# Allegro board CutiePi_V1_2.brd
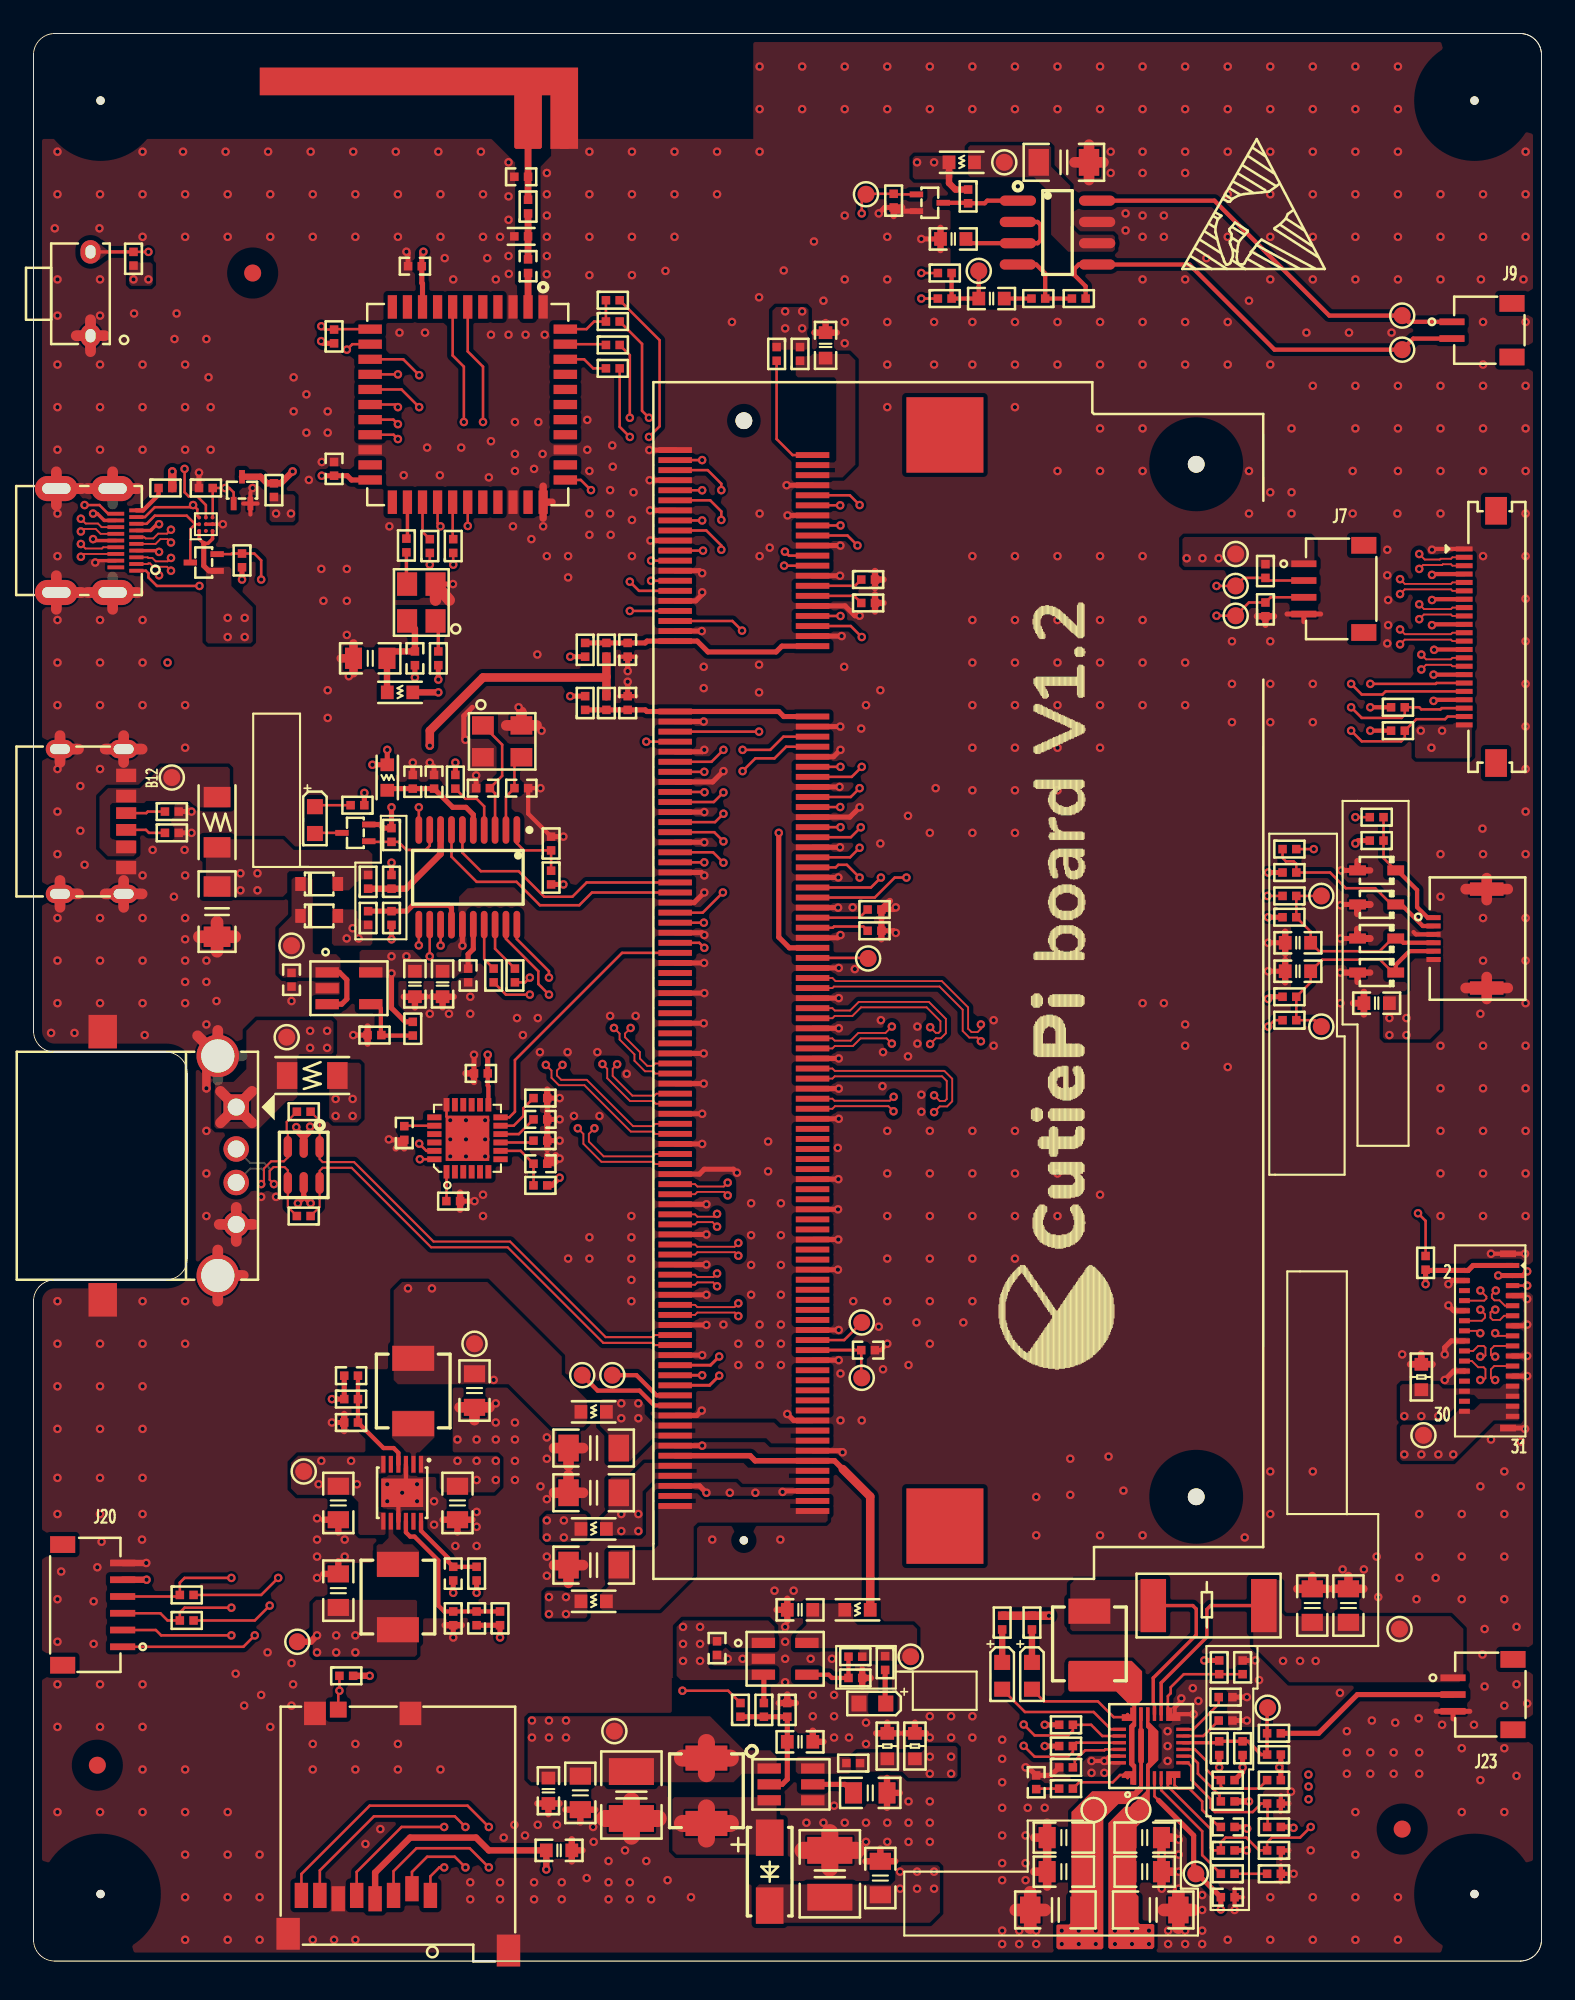
[diagram p0: board, top side]
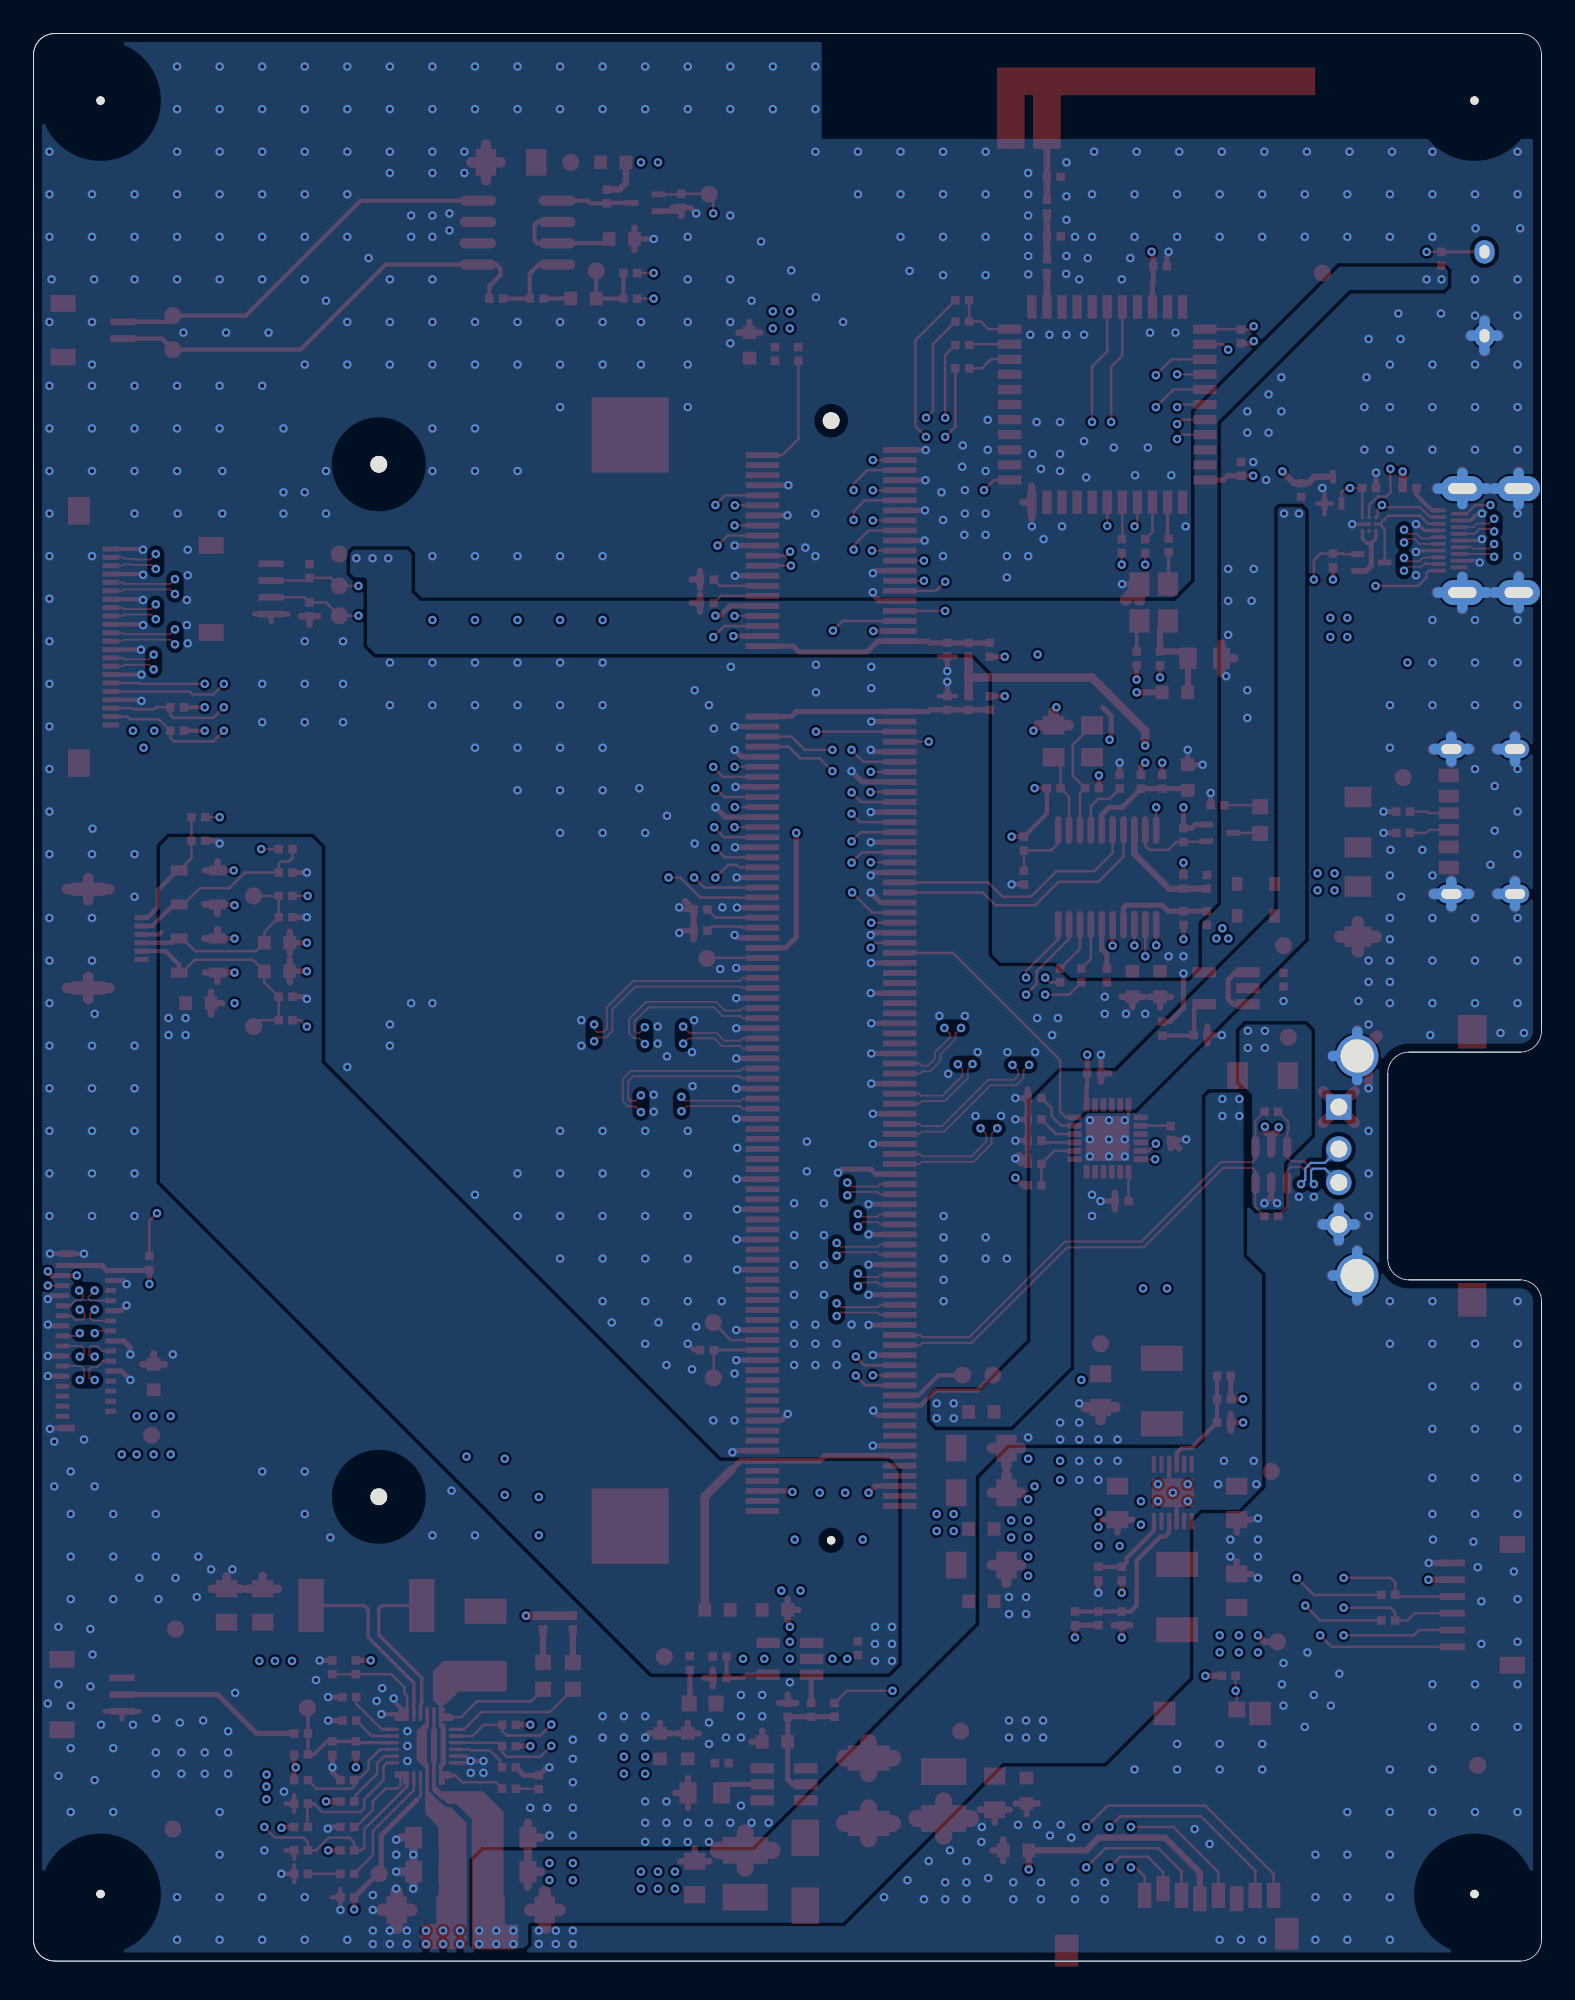
[diagram p1: board, bottom side, seen from below]

Outline 90.01 x 115 mm; copper layers: TOP, GND02, L03, L04, VCC05, BOTTOM. Coordinates in mm from the lower left corner of the outline.
Outline path: 0,113.73 0,55.5 ; 0,113.73 arc(0.37,114.63) 1.27,115 ; 0,113.73 0,55.5 ; 0,55.5 arc(0.37,54.6) 1.27,54.23 ; 1.27,115 88.74,115 ; 1.27,115 88.74,115 ; 0,39.37 0,1.27 ; 0,39.37 arc(0.37,40.27) 1.27,40.64 ; 0,39.37 0,1.27 ; 0,1.27 arc(0.37,0.37) 1.27,0 ; 1.27,40.64 7.91,40.64 ; 1.27,40.64 7.91,40.64 ; 88.74,115 arc(89.64,114.63) 90.01,113.73 ; 88.74,115 arc(89.64,114.63) 90.01,113.73 ; 1.27,54.23 7.91,54.23 ; 1.27,54.23 7.91,54.23 ; 7.91,54.23 arc(8.81,53.86) 9.18,52.96 ; 7.91,40.64 arc(8.81,41.01) 9.18,41.91 ; 1.27,0 88.74,0 ; 1.27,0 88.74,0 ; 88.74,0 arc(89.64,0.37) 90.01,1.27 ; 88.74,0 arc(89.64,0.37) 90.01,1.27 ; 9.18,52.96 9.18,41.91 ; 9.18,52.96 9.18,41.91 ; 90.01,113.73 90.01,1.27 ; 90.01,113.73 90.01,1.27

## Design rules (mm)
constraint set DEFAULT: min track width 0.152
net group N12785811: nets N12785811 N12785823
net group PCM_DIN: nets N12785967 PCM_DIN
net group PCM_DOUT: nets N12786047 PCM_DOUT
net group RXD1: nets N12785567 RXD1
net group TXD1: nets N12785535 TXD1
net group USB_D: nets USB_DM USB_DP
net group USB_PRE: nets N12666038 N12666138
net group BOOST_EN: nets BOOST_EN CHARGE_EN N12757066
net group CAM: nets CAM1_CN CAM1_CP CAM1_DN0 CAM1_DN1 CAM1_DN2 CAM1_DN3 CAM1_DP0 CAM1_DP1 CAM1_DP2 CAM1_DP3
net group CTS1: nets CTS1 N12785599 RTS1
net group DSI: nets DSI1_CN DSI1_CP DSI1_DN0 DSI1_DN1 DSI1_DN2 DSI1_DN3 DSI1_DP0 DSI1_DP1 DSI1_DP2 DSI1_DP3
net group GPIO9: nets GPIO9 N12403491 TXD0
net group GPIO10: nets GPIO10 N12403489 RXD0
net group HDMI: nets HDMI_CK_N HDMI_CK_P HDMI_D0_N HDMI_D0_P HDMI_D1_N HDMI_D1_P HDMI_D2_N HDMI_D2_P
net group VBUSA: nets N12836963

## Placement (name value [footprint] x y rotation side)
C1  47u/6.3V  [C1206]  33.43 23.62 180 top
C2  47u/6.3V  [C1206]  10.96 62.61 270 top
C3  47u/6.3V  [C1206]  33.43 27.94 180 top
C4  1u/10V  [C0402]  40.8 18.67 270 top
C5  4.7u/16V  [C0603]  45.75 20.95 180 top
C6  100n  [C0402]  25.05 23.11 270 top
C7  10u/16V  [C0805]  18.19 27.33 270 top
C8  10u/16V  [C0805]  25.31 27.33 270 top
C10  47u/6.3V  [C1206]  33.43 30.61 180 top
C11  10u/16V  [C0805]  18.19 22.1 90 top
C12  10u/16V  [C0805]  26.32 34.04 270 top
C13  1u/10V  [C0402]  35.47 78.23 270 top
C14  1u/10V  [C0402]  35.47 75.06 90 top
C20  47u/6.3V  [C1206]  61.5 107.31 0 top
C21  NC  [C0402]  18.96 34.92 0 top
C22  NC  [C0402]  26.45 20.45 90 top
C23  4.7u/16V  [C0603]  47.28 96.39 90 top
C24  4.7u/16V  [C0603]  31.37 6.6 0 top
C68  0.1uF/50V  [C0603]  30.73 10.16 270 top
C69  1.0uF/25V  [C0805]  32.64 10.03 270 top
C73  0.1uF/50V  [C0603]  45.75 13.08 0 top
C74  0.22uF/50V  [C0805]  49.94 10.03 0 top
C76  4.7uF/50V  [C1210]  47.53 5.21 90 top
C78  0.22uF/50V  [C0805]  50.55 4.95 90 top
C80  0.1uF/50V  [C0603]  80.17 57.15 180 top
C81  0.1uF/50V  [C0603]  75.47 60.75 180 top
C82  1000pF/50V  [C0603]  75.47 59.05 180 top
C85  4.7uF/50V  [C1210]  35.69 9.91 90 top
C86  4.7u/16V  [C0603]  54.9 102.74 180 top
C87  0.39u/16V  [C0603]  57.18 99.19 0 top
C383  100n  [C0402]  30.25 47.57 0 top
C384  100n  [C0402]  30.25 50.22 0 top
C385  100n  [C0402]  26.7 52.96 180 top
C386  2.2n  [C0402]  22.13 49.4 90 top
C2474  1u/10V  [C0402]  23.91 70.36 90 top
C2475  12pF/50V  [C0402]  29.12 69.98 0 top
C2476  12pF/50V  [C0402]  26.83 69.98 180 top
C2477  100n  [C0402]  25.94 58.8 270 top
C2478  4.7u/16V  [C0603]  24.42 58.29 270 top
C2479  10n  [C0402]  22.64 70.36 90 top
C2480  1u/10V  [C0402]  15.4 58.55 270 top
C2481  4.7u/16V  [C0603]  22.77 58.29 270 top
C2483  2.2u  [C0402]  59.85 10.67 270 top
C2484  47u/6.3V  [C1206]  60.99 3.05 180 top
C2485  10u/16V  [C0805]  61.5 5.33 180 top
C2486  10u/16V  [C0805]  61.5 7.37 180 top
C2487  47u/6.3V  [C1206]  66.84 3.05 0 top
C2488  10u/16V  [C0805]  66.33 5.33 0 top
C2489  10u/16V  [C0805]  66.33 7.37 0 top
C2490  10u/16V  [C0805]  76.33 21.21 90 top
C2491  10u/16V  [C0805]  78.49 21.21 90 top
C2492  100n  [C0402]  71.28 3.81 0 top
C2493  100n  [C0402]  71.28 8 0 top
C2498  270pF  [C0402]  29.52 101.12 270 top
C2499  1.5pF  [C0402]  29.11 106.45 180 top
C2500  100n  [C0402]  22.77 101.12 180 top
C2501  100n  [C0402]  17.94 89.03 90 top
C2502  0.1uF  [C0402]  22.77 77.72 270 top
C2503  10u/16V  [C0805]  20.1 77.72 0 top
D1  RED  [LED0603]  50.07 15.37 0 top
D10  SS14-M3/61T  [DO-214AC]  43.94 5.33 90 top
D11  ESDLIN1524BJ  [SOD323]  80.17 63.04 0 top
D12  ESDLIN1524BJ  [SOD323]  80.17 65.07 0 top
D13  ESDLIN1524BJ  [SOD323]  80.17 58.97 0 top
D14  ESDLIN1524BJ  [SOD323]  80.17 61.01 0 top
D17  BAT54HT1  [DIO-SOD323]  17.05 64.26 0 top
D18  BAT54HT1  [DIO-SOD323]  17.05 62.36 0 top
D19  GREEN  [LED0603]  16.8 68.07 90 top
D20  GREEN  [LED0603]  57.82 17.02 90 top
D21  GREEN  [LED0603]  59.6 17.02 90 top
F1  6V/2A  [1206]  10.96 67.94 270 top
F2  6V/0.5A  [1206]  16.64 52.83 180 top
FB2  BLM18PG121SH1  [SL0603]  55.41 107.31 0 top
FB3  BLM18PG121SH1  [SL0603]  33.43 21.46 0 top
FB4  BLM18PG121SH1  [SL0603]  33.43 25.78 0 top
FB5  BLM18PG121SH1  [SL0603]  33.43 32.77 0 top
FB6  BLM18PG121SH1  [SL0603]  49.18 20.95 0 top
FB7  BLM18PG121SH1  [SL0603]  21.12 70.61 270 top
FB9  BLM18PG121SH1  [SL0603]  21.88 75.69 0 top
J1  DDR2 SODIMM  [FCI_10033853_CM]  42.4 58.5 90 top
J2  Type C  [TYPE_C_P]  3.56 67.99 270 top
J7  SH1.0-4  [SH1_0_4]  75.82 81.87 90 top
J9  SH1.0-2  [SH1_0_2]  84.67 97.3 90 top
J11  54548-2271  [MOLEX_54548-2271]  85.4 79 90 top
J13  467651001  [MICRO_HDMI]  5.53 84.75 270 top
J14  USB-A  [USB_AM]  12.1 47.45 0 top
J16  473521001_sd  [MOLEX_473521001]  21.78 7.81 0 top
J17  FH52-6S-0.5SH  [CONFPC6_05MM_FH52]  85.15 61 90 top
J20  SH1.0-6  [SH1_0_6]  5.32 21.25 270 top
J21  FH26W-31S-0.3SHW  [CONFPC31_03MM_FH26W]  86.85 37 90 top
J23  SH1.0-3  [SH1_0_3]  84.73 15.9 90 top
L1  4.7u/16V  [SHC0402]  21.75 21.72 270 top
L2  4.7u/16V  [SHC0402]  22.66 34.01 90 top
L5  10uH/20%  [SHC0402]  40.17 10.16 270 top
L634  1.5u  [SHC0402]  63.03 18.92 90 top
L635  2.7nH/0.3nH  [L0402]  29.11 102.9 180 top
NOREF  -  []  1.36 81.65 90 top
NOREF#2  -  []  3.4 96.97 90 top
NOREF#3  -  [unnamed#2]  86.01 111 0 top
NOREF#4  -  []  5.53 67.49 90 top
NOREF#5  -  []  4.13 39.45 0 top
NOREF#6  -  []  5.38 63.67 90 top
NOREF#7  -  [unnamed#3]  81.69 7.87 0 top
NOREF#8  -  []  4 4 0 top
NOREF#9  -  [unnamed#2]  4 4 0 top
NOREF#10  -  []  -1.02 72.46 0 top
NOREF#11  -  []  86.01 4 90 top
NOREF#12  -  [unnamed#2]  86.01 4 0 top
NOREF#13  -  []  -1.02 63.52 90 top
NOREF#14  -  []  1.58 63.67 0 top
NOREF#15  -  []  -1 67.65 0 top
NOREF#16  -  []  -1.03 81.5 90 top
NOREF#17  -  []  6.14 86.55 90 top
NOREF#18  -  []  4.91 83.15 90 top
NOREF#19  -  []  11 40.9 0 top
NOREF#20  -  []  3.18 83.23 90 top
NOREF#21  -  []  4.55 96.47 90 top
NOREF#22  -  []  -1.03 81.5 90 top
NOREF#23  -  []  12.1 43.95 90 top
NOREF#24  -  []  3.17 78.87 0 top
NOREF#25  -  [unnamed#2]  4 111 0 top
NOREF#26  -  []  -1 54.25 90 top
NOREF#27  -  []  -1.02 63.52 90 top
NOREF#28  -  []  1.74 17.65 90 top
NOREF#29  -  []  -1.03 81.5 90 top
NOREF#30  -  []  15.94 62.36 0 top
NOREF#31  -  []  1.36 81.65 0 top
NOREF#32  -  []  11 40.9 90 top
NOREF#33  -  []  5.38 63.67 0 top
NOREF#34  -  []  4.13 39.45 90 top
NOREF#35  -  []  5.53 65.24 90 top
NOREF#36  -  []  12.1 46.45 90 top
NOREF#37  -  [unnamed#3]  13.08 100.71 0 top
NOREF#38  -  []  6.14 82.95 90 top
NOREF#39  -  []  5.32 18.75 90 top
NOREF#40  -  []  4.91 86.35 90 top
NOREF#41  -  []  4.55 96.47 90 top
NOREF#42  -  []  15.94 64.26 0 top
NOREF#43  -  []  5.53 66.47 90 top
NOREF#44  -  [unnamed#3]  3.81 11.68 0 top
NOREF#45  -  []  6.14 84.55 90 top
NOREF#46  -  []  1.58 63.67 90 top
NOREF#47  -  []  68.36 100.83 0 top
NOREF#48  -  []  3.4 96.97 90 top
PCB1  F_PCB  [ANT_F]  29.52 108.37 0 top
Q3  DMG1012T  [SOT50P160X90-3N]  10.16 83.44 180 top
Q4  DMG1012T  [SOT50P160X90-3N]  12.45 87.76 90 top
Q5  DMG1012T  [SOT50P160X90-3N]  19.21 67.31 180 top
Q6  DMG1012T  [SOT50P160X90-3N]  53.5 104.9 0 top
R2  100K  [R0402]  26.45 23.11 90 top
R3  2.49K  [R0402]  50.83 17.78 270 top
R7  0  [R0402]  32.93 78.23 270 top
R8  0  [R0402]  32.93 75.06 90 top
R12  4.7K  [C0402]  49.82 36.45 180 top
R15  NC  [R0402]  12.45 83.57 270 top
R16  4.7K  [R0402]  81.44 74.8 0 top
R17  4.7K  [R0402]  81.44 73.41 0 top
R18  10K  [R0402]  14.35 87.76 270 top
R22  0  [R0402]  18.96 33.53 0 top
R23  0  [R0402]  27.85 20.45 90 top
R24  NC  [R0402]  25.05 20.45 270 top
R25  NC  [R0402]  18.96 32.13 180 top
R26  100K  [R0402]  49.82 81.03 0 top
R27  100K  [R0402]  49.82 82.42 0 top
R28  100K  [R0402]  50.2 61.47 0 top
R29  100K  [R0402]  50.2 62.74 0 top
R30  10K  [R0402]  44.36 95.89 270 top
R31  0  [R0402]  45.75 95.89 90 top
R32  NC_0  [R0402]  34.2 78.23 270 top
R33  NC_0  [R0402]  34.2 75.06 90 top
R42  0  [R0402]  74.96 66.34 0 top
R43  0  [R0402]  80.17 68.25 180 top
R87  NC_10K  [R0402]  44.99 14.99 270 top
R88  0  [R0402]  42.2 14.99 90 top
R89  0  [R0402]  48.93 11.81 180 top
R90  3.3/1%  [R0603]  52.61 12.83 90 top
R91  3.3/1%  [R0603]  50.96 12.83 90 top
R110  39.2K  [R0402]  49.06 18.16 180 top
R112  36.5K  [R0402]  49.06 16.89 180 top
R114  4.7K  [R0402]  74.96 64.94 180 top
R115  4.7K  [R0402]  80.17 66.85 180 top
R117  10K  [R0402]  74.96 62.28 0 top
R118  NC_10K  [R0402]  74.96 57.53 0 top
R120  0  [R0402]  74.96 56.13 180 top
R121  0  [R0402]  74.96 63.55 180 top
R122  NC_0  [R0402]  16.13 44.45 180 top
R123  NC_0  [R0402]  16.13 50.67 180 top
R124  4.7K  [R0402]  55.79 105.28 270 top
R125  20K  [R0402]  62.39 99.19 180 top
R126  20K  [R0402]  59.98 99.19 180 top
R127  0  [R0402]  54.39 100.71 0 top
R128  NC_0  [R0402]  54.39 99.19 0 top
R272  10K  [R0402]  25.18 70.36 90 top
R368  10K  [R0402]  25.05 45.34 180 top
R370  0  [R0402]  30.25 46.28 180 top
R371  10K  [R0402]  30.25 51.49 180 top
R373  0  [R0402]  30.25 48.95 180 top
R3039  10K  [R0402]  30.89 66.67 90 top
R3040  NC_10K  [R0402]  30.89 64.64 270 top
R3041  0  [R0402]  27.47 58.8 90 top
R3042  0  [R0402]  28.74 58.8 90 top
R3043  10K  [R0402]  73.53 82.93 270 top
R3044  10K  [R0402]  73.53 80.64 270 top
R3049  30.1K  [R0402]  22.64 55.63 270 top
R3051  52.3K  [R0402]  20.35 55.24 0 top
R3052  15K  [R0402]  19.97 62.23 270 top
R3053  52.3K  [R0402]  21.37 62.23 270 top
R3054  10K  [R0402]  5.97 101.56 270 top
R3057  10K  [R0402]  83.09 41.66 90 top
R3058  0  [R0402]  7.87 87.88 0 top
R3059  10K  [R0402]  21.37 67.18 270 top
R3060  2.49K  [R0402]  19.34 68.96 180 top
R3061  10K  [R0402]  51.34 105.03 90 top
R3062  10K  [R0402]  10.29 87.88 0 top
R3063  NC_3.3/1%  [R0603]  82.84 34.84 90 top
R3064  15K  [R0402]  19.97 64.39 90 top
R3065  52.3K  [R0402]  21.37 64.39 90 top
R3066  10K  [R0402]  43.59 14.99 270 top
R3086  31.6K  [R0402]  74.04 10.79 180 top
R3087  2.49K  [R0402]  61.63 10.29 0 top
R3088  10K  [R0402]  71.28 10.79 180 top
R3089  20m/1W  [R2512]  70.14 21.21 0 top
R3090  5.1K  [R0402]  74.04 9.4 180 top
R3091  15K  [R0402]  74.04 8 0 top
R3092  5.1K  [R0402]  74.04 6.6 180 top
R3093  15K  [R0402]  71.28 6.6 0 top
R3094  10K  [R0402]  61.63 14.1 180 top
R3095  2.49K  [R0402]  57.82 20.19 90 top
R3096  10K  [R0402]  61.63 12.83 180 top
R3097  2.49K  [R0402]  71.28 9.53 0 top
R3098  0  [R0402]  74.04 13.59 180 top
R3099  10K  [R0402]  61.63 11.56 0 top
R3100  2.49K  [R0402]  59.6 20.19 90 top
R3101  10K  [R0402]  70.77 12.7 90 top
R3102  10K  [R0402]  70.77 17.53 270 top
R3103  30.1K  [R0402]  72.17 12.7 90 top
R3104  10K  [R0402]  72.17 17.53 270 top
R3105  10K  [R0402]  71.28 5.21 180 top
R3106  82.5K  [R0402]  71.15 14.35 180 top
R3107  39.2K  [R0402]  71.15 15.75 180 top
R3108  10K  [R0402]  74.04 5.21 0 top
R3122  0  [R0402]  34.58 95.02 0 top
R3123  0  [R0402]  34.58 96.42 0 top
R3124  0  [R0402]  34.58 99.09 0 top
R3125  NC_0  [R0402]  34.58 97.82 0 top
R3126  0  [R0402]  29.52 104.67 90 top
R3127  0  [R0402]  25.05 84.42 90 top
R3128  0  [R0402]  23.66 84.42 90 top
R3129  10K  [R0402]  17.94 96.93 90 top
R3130  10K  [R0402]  24.16 77.72 270 top
R3131  0  [R0402]  22.26 84.45 270 top
R3132  10K  [R0402]  18.67 17.02 0 top
R3133  5.1K  [R0402]  8.26 68.58 0 top
R3134  5.1K  [R0402]  8.26 67.31 0 top
R3135  0  [R0402]  9.14 21.84 0 top
R3136  0  [R0402]  9.14 20.32 0 top
R3137  36.5K  [R0402]  74.04 12.32 180 top
SW2  TC-0143  [BUTTON]  3.4 99.47 270 top
TP28  TEST POINT  [TESTPOINT_39MIL]  76.87 63.55 90 top
TP29  TEST POINT  [TESTPOINT_39MIL]  76.87 55.75 90 top
TP30  TEST POINT  [TESTPOINT_39MIL]  34.67 13.72 270 top
TP33  TEST POINT  [TESTPOINT_39MIL]  82.96 31.37 0 top
TP41  TEST POINT  [TESTPOINT_39MIL]  8.26 70.61 0 top
TP43  TEST POINT  [TESTPOINT_39MIL]  63.28 9.02 0 top
TP44  TEST POINT  [TESTPOINT_39MIL]  81.53 19.81 0 top
TP45  TEST POINT  [TESTPOINT_39MIL]  69.38 5.21 0 top
TP46  TEST POINT  [TESTPOINT_39MIL]  65.95 9.02 0 top
TP47  TEST POINT  [TESTPOINT_39MIL]  73.66 15.11 0 top
TP48  TEST POINT  [TESTPOINT_39MIL]  15.75 19.05 270 top
TP49  TEST POINT  [TESTPOINT_39MIL]  26.32 36.83 270 top
TP50  TEST POINT  [TESTPOINT_39MIL]  52.36 18.16 0 top
TP51  TEST POINT  [TESTPOINT_39MIL]  49.82 59.82 0 top
TP52  TEST POINT  [TESTPOINT_39MIL]  15.11 55.12 0 top
TP53  TEST POINT  [TESTPOINT_39MIL]  49.44 34.8 0 top
TP54  TEST POINT  [TESTPOINT_39MIL]  49.44 38.1 0 top
TP55  TEST POINT  [TESTPOINT_39MIL]  32.75 34.95 0 top
TP56  TEST POINT  [TESTPOINT_39MIL]  34.55 34.95 0 top
TP57  TEST POINT  [TESTPOINT_39MIL]  57.95 107.31 90 top
TP58  TEST POINT  [TESTPOINT_39MIL]  56.42 100.84 90 top
TP59  TEST POINT  [TESTPOINT_39MIL]  49.69 105.41 90 top
TP60  TEST POINT  [TESTPOINT_39MIL]  81.69 96.14 0 top
TP61  TEST POINT  [TESTPOINT_39MIL]  81.69 98.17 0 top
TP62  TEST POINT  [TESTPOINT_39MIL]  71.75 82.04 270 top
TP63  TEST POINT  [TESTPOINT_39MIL]  71.75 80.26 270 top
TP64  TEST POINT  [TESTPOINT_39MIL]  15.4 60.58 180 top
TP65  TEST POINT  [TESTPOINT_39MIL]  71.75 83.95 270 top
TP66  TEST POINT  [TESTPOINT_39MIL]  16.13 29.21 0 top
U1  PAM2306AYPKE  [DIODES_PAM2306]  22 27.94 270 top
U2  TPS73633DBVR  [SOT23_5]  44.86 18.03 270 top
U4  ESD5384_NC  [ONSEMI_ESD5384]  10.29 85.72 90 top
U5  IP4234CZ6  [TSOP6]  16.13 47.5 180 top
U6  TPS61165DBV  [SOT23_6B]  45.21 10.54 270 top
U12  LM4871MX  [SOIC8_1D27MM]  61.12 103.12 270 top
U18  stm32f030f4p6  [TSSOP20_0D65MM]  25.92 64.66 180 top
U57  MPU6050  [QFN24_05MM_0404MML]  25.9 49.09 90 top
U60  TPS73633DBVR  [SOT23_5]  18.83 58.04 270 top
U597  MP2636GR  [QFN-30]  66.71 12.83 90 top
U598  RTL8723BS  [MOD44_RTL8723BS]  25.92 92.86 270 top
Y2  25M  [XTAL-3225_25M]  27.97 72.77 180 top
Y10  32.768KHz  [XTAL-3225_32K]  23.15 81.05 90 top

## Library data of the parts
C1-C3 C10 C20 C2484 C2487 = CAP_3216_6.3V_47u: Tolerance: tol*
C4 C13 C14 C2480 = CAP_1005_6.3V_1u
C5 C23 C24 C86 C87 C2478 C2481 = CAP_1608_6.3V_4.7u: Tolerance: tol*
C6 C383-C386 C2474 C2477 C2479 C2483 C2492 C2493 C2500 C2501 = CAP_1005_6.3V_100n
C7 C8 C11 C12 C2485 C2486 C2488-C2491 = CAP_2012_6.3V_10u: Tolerance: tol*
C21 C22 = CAP_1005_NF
C68 C69 C73 C74 C76 C78 C82 C85 = CAP: Tolerance: tol*
C80 C81 = CAP_0: Tolerance: tol*
C2475 C2476 = C_0603_22P/50V/5%
C2498 C2499 C2502 = C_0
C2503 = C_0: Tolerance: tol*
D1 = LED_1608_RED_0
D10 = S100: User Part Number: pn
D11-D14 = SMAJ30CA: User Part Number: PN
D17 D18 = DIODE_0: User Part Number: PN
D19-D21 = LED_1608_GREEN_0
F1 F2 = FUSE_POLY_2.0A_6V: Tolerance: tol*
FB2-FB7 = INDUCTOR_0: Tolerance: tol*; room: USB+5V
FB9 = BEAD_0: Tolerance: tol*
J1 = CON_200W_DDR2SODIMM_CM
J2 = CON_uUSB_B_3: User Part Number: PN
J7 = A2002WV-6P_7
J9 = A2002WV-6P_8
J11 = CON_22W_FFC_54548-2271
J13 = CON_HDMI_RA: User Part Number: PN
J14 = CON_USBA_RA_PTH_0
J16 = CON_uSD_2: User Part Number: PN
J17 = A2002WV-6P_3: User Part Number: PN
J20 = A2002WV-6P_2
J21 = CON32_1: User Part Number: PN
J23 = A2002WV-6P_4
L1 L2 L634 = IND_4u7_SRN4018-4R7M: User Part Number: pn
L5 = IND: User Part Number: pn
L635 = INDUCTOR
PCB1 = RF_1: User Part Number: PN
Q3-Q6 = MOSFET_N_DMG1012T
R2 R18 R26-R29 R3059 R3061 R3062 R3133 R3134 = RES_1005_100K
R3 R3060 = RES_1005_470R
R7 R8 R31-R33 = RES_2012_0R
R12 = RES_1005_1K
R15 = RES_1005_27K
R16 R17 = RES_1005_1.8K
R22 R23 = RES_1005_0R
R24 R25 = RES_1005_NF
R30 R3132 = RES_1005_47K
R42 R43 R87-R89 R120-R123 R127 R128 R368 R370 R371 R373 R3052 R3057 R3064 R3066 R3086-R3088 R3090-R3093 R3095 R3097-R3108 R3129 R3137 = RES
R90 R91 R3063 R3089 = RES: Tolerance: tol*
R110 R112 R114 R115 R117 R118 R124-R126 R3049 R3051 R3053 R3065 = RES_0
R272 R3054 = R_0603_10K/5%
R3039 R3040 R3130 R3131 = R_0402_22R/5%
R3041 R3042 R3058 R3094 R3096 R3122-R3128 R3135 R3136 = R_1: signal model: DEFAULT_RESISTOR_0.001OHM_1_2
R3043 R3044 = R_0603/4.7K/5%
SW2 = SKEG_DIP2_2: User Part Number: PN
TP28-TP30 TP33 TP41 TP43-TP66 = Test pad: Tolerance: *; User Part Number: *; room: P10-PMIC
U1 = IC_SMPS_DUAL_1A_3V3_2
U2 U60 = LP3470/SOT23_1
U4 = IC_ESD5384_1
U5 = TMP100-Q1_0: User Part Number: pn
U6 = TPS61165TDB
U12 = SMD_EEPROM_SO8_0: User Part Number: pn
U18 = XF6000SYE_1: User Part Number: pn
U57 = TUSB1210BRHBT_2: User Part Number: PN
U597 = STM8AF6226TA_5: User Part Number: PN
U598 = STM8AF6226TA_9: User Part Number: PN
Y2 = X_0
Y10 = XTAL-3225-4P-TXC_0

## Footprints (pads in the part's own frame, mm; a bottom-side part is the same pattern mirrored in y, then rotated)
1206
  rect 1.219x1.6 smd: 1(-1.5,0) 2(1.5,0)
ANT_F
  rect 0.5x0.5 smd: 1(0,0) 2(2.159,0)
BUTTON
  oval 1.4x1.2 hole 0.8x0.6: 1(2.5,0) 2(-2.5,0)
C0402
  rect 0.508x0.508 smd: 1(-0.41,0) 2(0.41,0)
C0603
  rect 0.762x0.813 smd: 1(-0.76,0) 2(0.76,0)
C0805
  rect 1.016x1.27 smd: 1(-1,0) 2(1,0)
C1206
  rect 1.219x1.6 smd: 1(-1.5,0) 2(1.5,0)
C1210
  rect 1.6x2.692 smd: 1(-1.4,0) 2(1.4,0)
CONFPC6_05MM_FH52
  rect 0.3x0.85 smd: 1(1.25,1.587) 2(0.75,1.587) 3(0.25,1.587) 4(-0.25,1.587) 5(-0.75,1.587) 6(-1.25,1.587)
  rect 0.8x2 smd: 7(-2.95,-1.587) 8(2.95,-1.587)
CONFPC31_03MM_FH26W
  rect 0.3x0.8 smd: 1(4.5,-1.437) 3(3.9,-1.437) 5(3.3,-1.437) 7(2.7,-1.437) 9(2.1,-1.437) 11(1.5,-1.437) 13(0.9,-1.437) 15(0.3,-1.437) 17(-0.3,-1.437) 19(-0.9,-1.437) 21(-1.5,-1.437) 23(-2.1,-1.437) 25(-2.7,-1.437) 27(-3.3,-1.437) 29(-3.9,-1.437) 31(-4.5,-1.437)
  rect 0.3x0.65 smd: 2(4.2,1.437) 4(3.6,1.437) 6(3,1.437) 8(2.4,1.437) 10(1.8,1.437) 12(1.2,1.437) 14(0.6,1.437) 16(0,1.437) 18(-0.6,1.437) 20(-1.2,1.437) 22(-1.8,1.437) 24(-2.4,1.437) 26(-3,1.437) 28(-3.6,1.437) 30(-4.2,1.437)
  rect 0.4x0.95 smd: G1(-5.2,-1.165) G2(5.2,-1.165)
DIO-SOD323
  rect 0.63x0.83 smd: 1(-1.115,0) 2(1.115,0)
DIODES_PAM2306
  rect 1x0.25 smd: 1(-1.7,1.125) 2(-1.7,0.675) 3(-1.7,0.225) 4(-1.7,-0.225) 5(-1.7,-0.675) 6(-1.7,-1.125) 7(1.7,-1.125) 8(1.7,-0.675) 9(1.7,-0.225) 10(1.7,0.225) 11(1.7,0.675) 12(1.7,1.125)
  rect 1.7x2.5 smd: 13(0,0)
DO-214AC
  rect 2.17x1.65 smd: A(2.025,0) C(-2.025,0)
FCI_10033853_CM
  round 0.5 hole 1.1 unplated: (-33.4,0)
  rect 4.5x4.6 smd: (-32.55,-12) (32.55,-12)
  round 1 hole 2.4 unplated: (-30.8,-27) (30.8,-27)
  round 1 hole 1.6 unplated: (33.4,0)
  rect 0.35x2 smd: 1(31.65,4.1) 2(31.35,-4.1) 3(31.05,4.1) 4(30.75,-4.1) 5(30.45,4.1) 6(30.15,-4.1) 7(29.85,4.1) 8(29.55,-4.1) 9(29.25,4.1) 10(28.95,-4.1) 11(28.65,4.1) 12(28.35,-4.1) 13(28.05,4.1) 14(27.75,-4.1) 15(27.45,4.1) 16(27.15,-4.1) 17(26.85,4.1) 18(26.55,-4.1) 19(26.25,4.1) 20(25.95,-4.1) 21(25.65,4.1) 22(25.35,-4.1) 23(25.05,4.1) 24(24.75,-4.1) 25(24.45,4.1) 26(24.15,-4.1) 27(23.85,4.1) 28(23.55,-4.1) 29(23.25,4.1) 30(22.95,-4.1) 31(22.65,4.1) 32(22.35,-4.1) 33(22.05,4.1) 34(21.75,-4.1) 35(21.45,4.1) 36(21.15,-4.1) 37(20.85,4.1) 38(20.55,-4.1) 39(20.25,4.1) 40(19.95,-4.1) 41(16.05,4.1) 42(15.75,-4.1) 43(15.45,4.1) 44(15.15,-4.1) 45(14.85,4.1) 46(14.55,-4.1) 47(14.25,4.1) 48(13.95,-4.1) 49(13.65,4.1) 50(13.35,-4.1) 51(13.05,4.1) 52(12.75,-4.1) 53(12.45,4.1) 54(12.15,-4.1) 55(11.85,4.1) 56(11.55,-4.1) 57(11.25,4.1) 58(10.95,-4.1) 59(10.65,4.1) 60(10.35,-4.1) 61(10.05,4.1) 62(9.75,-4.1) 63(9.45,4.1) 64(9.15,-4.1) 65(8.85,4.1) 66(8.55,-4.1) 67(8.25,4.1) 68(7.95,-4.1) 69(7.65,4.1) 70(7.35,-4.1) 71(7.05,4.1) 72(6.75,-4.1) 73(6.45,4.1) 74(6.15,-4.1) 75(5.85,4.1) 76(5.55,-4.1) 77(5.25,4.1) 78(4.95,-4.1) 79(4.65,4.1) 80(4.35,-4.1) 81(4.05,4.1) 82(3.75,-4.1) 83(3.45,4.1) 84(3.15,-4.1) 85(2.85,4.1) 86(2.55,-4.1) 87(2.25,4.1) 88(1.95,-4.1) 89(1.65,4.1) 90(1.35,-4.1) 91(1.05,4.1) 92(0.75,-4.1) 93(0.45,4.1) 94(0.15,-4.1) 95(-0.15,4.1) 96(-0.45,-4.1) 97(-0.75,4.1) 98(-1.05,-4.1) 99(-1.35,4.1) 100(-1.65,-4.1) 101(-1.95,4.1) 102(-2.25,-4.1) 103(-2.55,4.1) 104(-2.85,-4.1) 105(-3.15,4.1) 106(-3.45,-4.1) 107(-3.75,4.1) 108(-4.05,-4.1) 109(-4.35,4.1) 110(-4.65,-4.1) 111(-4.95,4.1) 112(-5.25,-4.1) 113(-5.55,4.1) 114(-5.85,-4.1) 115(-6.15,4.1) 116(-6.45,-4.1) 117(-6.75,4.1) 118(-7.05,-4.1) 119(-7.35,4.1) 120(-7.65,-4.1) 121(-7.95,4.1) 122(-8.25,-4.1) 123(-8.55,4.1) 124(-8.85,-4.1) 125(-9.15,4.1) 126(-9.45,-4.1) 127(-9.75,4.1) 128(-10.05,-4.1) 129(-10.35,4.1) 130(-10.65,-4.1) 131(-10.95,4.1) 132(-11.25,-4.1) 133(-11.55,4.1) 134(-11.85,-4.1) 135(-12.15,4.1) 136(-12.45,-4.1) 137(-12.75,4.1) 138(-13.05,-4.1) 139(-13.35,4.1) 140(-13.65,-4.1) 141(-13.95,4.1) 142(-14.25,-4.1) 143(-14.55,4.1) 144(-14.85,-4.1) 145(-15.15,4.1) 146(-15.45,-4.1) 147(-15.75,4.1) 148(-16.05,-4.1) 149(-16.35,4.1) 150(-16.65,-4.1) 151(-16.95,4.1) 152(-17.25,-4.1) 153(-17.55,4.1) 154(-17.85,-4.1) 155(-18.15,4.1) 156(-18.45,-4.1) 157(-18.75,4.1) 158(-19.05,-4.1) 159(-19.35,4.1) 160(-19.65,-4.1) 161(-19.95,4.1) 162(-20.25,-4.1) 163(-20.55,4.1) 164(-20.85,-4.1) 165(-21.15,4.1) 166(-21.45,-4.1) 167(-21.75,4.1) 168(-22.05,-4.1) 169(-22.35,4.1) 170(-22.65,-4.1) 171(-22.95,4.1) 172(-23.25,-4.1) 173(-23.55,4.1) 174(-23.85,-4.1) 175(-24.15,4.1) 176(-24.45,-4.1) 177(-24.75,4.1) 178(-25.05,-4.1) 179(-25.35,4.1) 180(-25.65,-4.1) 181(-25.95,4.1) 182(-26.25,-4.1) 183(-26.55,4.1) 184(-26.85,-4.1) 185(-27.15,4.1) 186(-27.45,-4.1) 187(-27.75,4.1) 188(-28.05,-4.1) 189(-28.35,4.1) 190(-28.65,-4.1) 191(-28.95,4.1) 192(-29.25,-4.1) 193(-29.55,4.1) 194(-29.85,-4.1) 195(-30.15,4.1) 196(-30.45,-4.1) 197(-30.75,4.1) 198(-31.05,-4.1) 199(-31.35,4.1) 200(-31.65,-4.1)
L0402
  rect 0.508x0.508 smd: 1(-0.41,0) 2(0.41,0)
LED0603
  rect 0.9x0.95 smd: 1(0.8,0) 2(-0.8,0)
MICRO_HDMI
  rect 0.23x0.85 smd: 1(1.8,0.612) 3(1.4,0.612) 5(1,0.612) 7(0.6,0.612) 9(0.2,0.612) 11(-0.2,0.612) 13(-0.6,0.612) 15(-1,0.612) 17(-1.4,0.612) 19(-1.8,0.612)
  rect 0.23x1 smd: 2(1.6,-0.612) 4(1.2,-0.612) 6(0.8,-0.612) 8(0.4,-0.612) 10(0,-0.612) 12(-0.4,-0.612) 14(-0.8,-0.612) 16(-1.2,-0.612) 18(-1.6,-0.612)
  oval 1.5x2.55 hole 0.65x1.7: 20(3.1,-4.163) 21(-3.1,-0.802) 22(3.1,-0.802) 23(-3.1,-4.163)
MOD44_RTL8723BS
  rect 1.4x0.55 smd: 1(-5.825,4.5) 2(-5.825,3.6) 3(-5.825,2.7) 4(-5.825,1.8) 5(-5.825,0.9) 6(-5.825,0) 7(-5.825,-0.9) 8(-5.825,-1.8) 9(-5.825,-2.7) 10(-5.825,-3.6) 11(-5.825,-4.5) 23(5.825,-4.5) 24(5.825,-3.6) 25(5.825,-2.7) 26(5.825,-1.8) 27(5.825,-0.9) 28(5.825,0) 29(5.825,0.9) 30(5.825,1.8) 31(5.825,2.7) 32(5.825,3.6) 33(5.825,4.5)
  rect 0.55x1.4 smd: 12(-4.5,-5.825) 13(-3.6,-5.825) 14(-2.7,-5.825) 15(-1.8,-5.825) 16(-0.9,-5.825) 17(0,-5.825) 18(0.9,-5.825) 19(1.8,-5.825) 20(2.7,-5.825) 21(3.6,-5.825) 22(4.5,-5.825) 34(4.5,5.825) 35(3.6,5.825) 36(2.7,5.825) 37(1.8,5.825) 38(0.9,5.825) 39(0,5.825) 40(-0.9,5.825) 41(-1.8,5.825) 42(-2.7,5.825) 43(-3.6,5.825) 44(-4.5,5.825)
MOLEX_54548-2271
  rect 1.65x1.3 smd: (-7.525,-1.9) (7.525,-1.9)
  rect 0.3x1 smd: 1(5.25,0) 2(4.75,0) 3(4.25,0) 4(3.75,0) 5(3.25,0) 6(2.75,0) 7(2.25,0) 8(1.75,0) 9(1.25,0) 10(0.75,0) 11(0.25,0) 12(-0.25,0) 13(-0.75,0) 14(-1.25,0) 15(-1.75,0) 16(-2.25,0) 17(-2.75,0) 18(-3.25,0) 19(-3.75,0) 20(-4.25,0) 21(-4.75,0) 22(-5.25,0)
MOLEX_473521001
  rect 0.8x1.5 smd: 1(1.915,-3.898) 2(0.815,-3.498) 3(-0.285,-3.898) 4(-1.385,-4.098) 5(-2.485,-3.898) 6(-3.585,-4.098) 7(-4.685,-3.898) 8(-5.785,-3.898)
  rect 1x0.95 smd: 9(-3.585,7.187)
  rect 1.4x1.9 smd: 10(6.575,-7.187) 11(-6.575,-6.187)
  rect 1.3x1.4 smd: 12(-4.975,6.962) 13(0.725,6.962)
ONSEMI_ESD5384
  round 0.235 smd: A1(-0.4,0.4) A2(0,0.4) A3(0.4,0.4) B1(-0.4,0) B2(0,0) B3(0.4,0) C1(-0.4,-0.4) C2(0,-0.4) C3(0.4,-0.4)
QFN24_05MM_0404MML
  rect 0.8x0.35 smd: 1(-2,1.25) 2(-2,0.75) 3(-2,0.25) 4(-2,-0.25) 5(-2,-0.75) 6(-2,-1.25) 13(2,-1.25) 14(2,-0.75) 15(2,-0.25) 16(2,0.25) 17(2,0.75) 18(2,1.25)
  rect 0.35x0.85 smd: 7(-1.25,-1.975) 8(-0.75,-1.975) 9(-0.25,-1.975) 10(0.25,-1.975) 11(0.75,-1.975) 12(1.25,-1.975) 19(1.25,1.975) 20(0.75,1.975) 21(0.25,1.975) 22(-0.25,1.975) 23(-0.75,1.975) 24(-1.25,1.975)
  rect 2.7x2.6 smd: 25(0,0)
QFN-30
  custom 0.8x0.7 smd: 1(-1.9,1.4) 8(-1.9,-1.4) 15(1.9,-1.4) 22(1.9,1.4)
  rect 0.8x0.2 smd: 2(-1.9,1) 3(-1.9,0.6) 4(-1.9,0.2) 5(-1.9,-0.2) 6(-1.9,-0.6) 7(-1.9,-1) 16(1.9,-1) 17(1.9,-0.6) 18(1.9,-0.2) 19(1.9,0.2) 20(1.9,0.6) 21(1.9,1)
  rect 0.2x0.8 smd: 9(-1,-1.9) 10(-0.6,-1.9) 11(-0.2,-1.9) 12(0.2,-1.9) 13(0.6,-1.9) 14(1,-1.9) 23(1,1.9) 24(0.6,1.9) 25(0.2,1.9) 26(-0.2,1.9) 27(-0.6,1.9) 28(-1,1.9)
  rect 1.8x0.3 smd: 29(0,0.6) 30(0,0)
R0402
  rect 0.508x0.508 smd: 1(-0.41,0) 2(0.41,0)
R0603
  rect 0.762x0.813 smd: 1(-0.76,0) 2(0.76,0)
R2512
  rect 1.524x3.175 smd: 1(-3.3,0) 2(3.3,0)
SH1_0_2
  rect 1x1.5 smd: (-1.6,-3.58) (1.6,-3.58)
  rect 0.4x1.5 smd: 1(0.5,0) 2(-0.5,0)
SH1_0_3
  rect 1x1.5 smd: (-2.1,-3.58) (2.1,-3.58)
  rect 0.4x1.5 smd: 1(1,0) 2(0,0) 3(-1,0)
SH1_0_4
  rect 1x1.5 smd: (-2.6,-3.58) (2.6,-3.58)
  rect 0.4x1.5 smd: 1(1.5,0) 2(0.5,0) 3(-0.5,0) 4(-1.5,0)
SH1_0_6
  rect 1x1.5 smd: (-3.6,-3.58) (3.6,-3.58)
  rect 0.4x1.5 smd: 1(2.5,0) 2(1.5,0) 3(0.5,0) 4(-0.5,0) 5(-1.5,0) 6(-2.5,0)
SHC0402
  rect 1.5x2.5 smd: 1(-1.95,0) 2(1.95,0)
SL0603
  rect 0.762x0.813 smd: 1(-0.76,0) 2(0.76,0)
SOD323
  rect 1x0.6 smd: A(-1.14,0) C(1.14,0)
SOIC8_1D27MM
  oval 0.61x2.17 smd: 1(-1.905,-2.365) 2(-0.635,-2.365) 3(0.635,-2.365) 4(1.905,-2.365) 5(1.905,2.365) 6(0.635,2.365) 7(-0.635,2.365) 8(-1.905,2.365)
SOT23_5
  rect 0.61x1.397 smd: 1(-0.95,-1.3) 2(0,-1.3) 3(0.95,-1.3) 4(0.95,1.3) 5(-0.95,1.3)
SOT23_6B
  rect 0.61x1.397 smd: 1(-0.95,-1.3) 2(0,-1.3) 3(0.95,-1.3) 4(0.95,1.3) 5(0,1.3) 6(-0.95,1.3)
SOT50P160X90-3N
  rect 0.8x0.35 smd: 1(-0.8,0.5) 2(-0.8,-0.5) 3(0.8,0)
TESTPOINT_39MIL
  round 1.016 smd: 1(0,0)
TSOP6
  oval 0.5x1.3 smd: 1(-0.95,-1.075) 2(0,-1.075) 3(0.95,-1.075) 4(0.95,1.075) 5(0,1.075) 6(-0.95,1.075)
TSSOP20_0D65MM
  oval 0.4x1.65 smd: 1(-2.925,-2.825) 2(-2.275,-2.825) 3(-1.625,-2.825) 4(-0.975,-2.825) 5(-0.325,-2.825) 6(0.325,-2.825) 7(0.975,-2.825) 8(1.625,-2.825) 9(2.275,-2.825) 10(2.925,-2.825) 11(2.925,2.825) 12(2.275,2.825) 13(1.625,2.825) 14(0.975,2.825) 15(0.325,2.825) 16(-0.325,2.825) 17(-0.975,2.825) 18(-1.625,2.825) 19(-2.275,2.825) 20(-2.925,2.825)
TYPE_C_P
  oval 1.1x1.7 hole 0.6x1.2: 1(-4.32,1.825) 2(-4.32,-1.975) 3(4.32,-1.975) 4(4.32,1.825)
  rect 0.7x1.2 smd: A5(-0.5,1.975) B5(0.5,1.975)
  rect 0.76x1.2 smd: A9(1.52,1.975) B9(-1.52,1.975)
  rect 0.8x1.2 smd: A12(2.75,1.975) B12(-2.75,1.975)
unnamed#2
  round 0.5 hole 3.4 unplated: (0,0)
unnamed#3
  round 1.016 smd: (0,0)
USB_AM
  rect 1.524x1.524 hole 1.016: 1(0,3.5)
  round 1.524 hole 1.016: 2(0,1) 3(0,-1) 4(0,-3.5)
  round 2.54 hole 1.981: 5(-1.1,6.55) 6(-1.1,-6.55)
  rect 1.7x2 smd: 7(-7.97,8) 8(-7.97,-8)
XTAL-3225_25M
  rect 1.3x1.1 smd: 1(1.15,-0.95) 2(-1.15,-0.95) 3(-1.15,0.95) 4(1.15,0.95)
XTAL-3225_32K
  rect 1.4x1.2 smd: 1(-1.1,-0.85) 2(1.1,-0.85) 3(1.1,0.85) 4(-1.1,0.85)

## Nets
1V8: C12.1 C22.1 FB5.1 L2.2 R23.1 R32.2 R33.2 TP49.1(PIN1)
3V3: C4.1 C11.1 C21.1 C80.1 FB4.1 J17.6 L1.2 R22.1 R114.2 R115.2 R117.1 R118.1 R3066.1 TP48.1(PIN1) U2.1 U2.3
5V: C2.1 C2487.1 C2488.1 C2489.1 D17.2 F1.2(P2) R3064.2(B) R3091.2(B) R3093.2(B) TP46.1(PIN1) U597.4 U597.19(VIN3) U597.30
GND: C1.2 C2.2 C3.2 C4.2 C5.2 C6.2 C7.2 C8.2 C10.2 C11.2 C12.2 C13.2 C14.2 C20.2 C23.2 C24.2 C68.2 C69.2 C73.2 C74.2 C76.2 C78.2 C80.2 C81.2 C82.2 C85.1 C86.2 C383.2 C384.2 C385.2 C386.1 C2474.2 C2475.2 C2476.2 C2477.2 C2478.2 C2479.2 C2480.2 C2481.2 C2483.1 C2484.2 C2485.2 C2486.2 C2487.2 C2488.2 C2489.2 C2490.2 C2491.2 C2492.2 C2493.2 C2499.2 C2500.2 C2501.2 C2502.2 C2503.1 D1.2(CATHODE) D11.A D12.A D13.A D14.A J1.1 J1.7 J1.8 J1.13 J1.14 J1.19 J1.20 J1.25 J1.26 J1.31 J1.32 J1.37 J1.38 J1.43 J1.44 J1.49 J1.50 J1.55 J1.56 J1.61 J1.62 J1.67 J1.68 J1.73 J1.74 J1.79 J1.80 J1.85 J1.86 J1.91 J1.92 J1.97 J1.98 J1.103 J1.104 J1.109 J1.110 J1.115 J1.116 J1.121 J1.122 J1.127 J1.133 J1.134 J1.139 J1.140 J1.145 J1.146 J1.151 J1.152 J1.157 J1.163 J1.164 J1.169 J1.170 J1.181 J1.182 J1.187 J1.188 J1.195 J1.196 J2.1 J2.2 J2.3 J2.4(SH4) J2.A12 J2.B12 J7.4 J11.1 J11.4 J11.7 J11.10 J11.13 J11.16 J11.19 J13.4 J13.7 J13.10 J13.13 J13.16 J13.20 J13.21 J13.22 J13.23(SH4) J14.4 J14.5 J14.6 J14.7 J14.8(P8) J16.6(VSS) J16.10 J16.11 J16.12 J16.13 J17.3 J17.7 J17.8(G2) J20.6 J21.4 J21.7 J21.10 J21.13 J21.16 J21.19 J21.22 J21.23 J21.G1 J21.G2 J23.3 L635.2 PCB1.2 Q4.2(S) Q5.2(S) Q6.2(S) R12.1 R24.2 R25.2 R26.2 R27.2 R28.2 R29.2 R87.1 R90.2(B) R91.2(B) R112.1 R368.1 R371.1 R373.1 R3039.2 R3044.2 R3051.1 R3053.2 R3059.1 R3061.1 R3062.1 R3063.2(B) R3065.2 R3088.1 R3090.1 R3092.1 R3099.1 R3103.1 R3104.1 R3106.1 R3107.1 R3108.2(B) R3133.2 R3134.2 SW2.1 U1.3 U1.9 U1.13 U2.2 U4.B2 U4.C2 U5.2 U6.4 U12.7 U18.15(VSS) U57.18 U57.25 U60.2 U597.15 U597.27 U597.28 U598.1 U598.3 U598.20 U598.31 U598.33 U598.36 Y2.2 Y2.4 Y10.2
VBAT: C2490.1 C2491.1 D18.2 J23.1 R3052.2(B) R3089.2(B) R3095.2(B) R3097.2(B) R3100.2(B) TP44.1(PIN1) U597.17
VBAT_AD: R3052.1 R3053.1 U18.14
VBUS: C7.1 C8.1 C68.1 C69.1 C85.2 C2484.1 C2485.1 C2486.1 F2.1 FB2.1 FB3.1 L5.1 Q3.1 R2.1 R124.1 R3086.1 R3101.1 R3137.1 TP30.1(PIN1) TP43.1(PIN1) TP66.1(PIN1) U1.1(VIN2) U1.6 U1.7 U4.A1 U4.C1 U6.1(VIN) U597.3 U597.20 U597.29
VBUSA: F2.2(P2) J14.1 R3058.2 TP52.1(PIN1) U5.5(PW)
VDD_AMP: C20.1 FB2.2 TP57.1(PIN1) U12.6
VDD_CORE: J1.179 TP55.1(PIN1)
VDDA: C2474.1 C2479.1 FB7.2 U18.5
AMP_SHUTDOWN: J1.81 Q6.1 R3061.2 TP59.1(PIN1)
AUDIO_L: J1.70 R127.1
AUDIO_R: J1.72 R128.1
BL_EN: J1.45 R88.2(B)
BOOST_EN: R3094.1 U18.11 U597.24
BT_DIS: J1.47 U598.34
BT_H_WAKE: J1.36 U598.7
BT_WAKE: J1.34 U598.6
CAM1_CN: J1.149 J11.8
CAM1_CP: J1.147 J11.9(P9)
CAM1_DN0: J1.161 J11.2
CAM1_DN1: J1.155 J11.5
CAM1_DN2: J1.143 J11.11
CAM1_DN3: J1.137 J11.14
CAM1_DP0: J1.159 J11.3
CAM1_DP1: J1.153 J11.6
CAM1_DP2: J1.141 J11.12
CAM1_DP3: J1.135 J11.15
CAM1_IO0: J1.17 J11.17
CAM1_IO1: J1.15 J11.18
CHARGE_EN: R3096.1 U18.12 U597.25
CM_1V8: C10.1 FB5.2 J1.183 J1.184 J1.185 J1.186 J21.3 R18.2
CM_3V3: C3.1 C24.1 C385.1 C2500.1 C2501.1 FB4.2 FB9.2 J1.191 J1.192 J1.193 J1.194 J11.22 J16.4 J20.5 J21.1 J21.2 R7.2 R8.2 R15.2 R16.1 R17.1 R30.1 R31.2 R370.1 R3057.1 R3129.1 R3130.2 R3132.2 U57.13 U598.9 U598.22
CM_VBAT: C1.1 FB3.2 J1.197 J1.198 J1.199 J1.200
CM_VDAC: FB6.2 J1.189 J1.190
CTS1: J1.57 R3124.2
DAC_2V5: C5.1 FB6.1 R3.1 R110.1 TP50.1(PIN1) U2.5(OUT)
DSI1_CN: J1.102 J21.14
DSI1_CP: J1.100 J21.15
DSI1_DN0: J1.96 J21.11
DSI1_DN1: J1.120 J21.17
DSI1_DN2: J1.114 J21.20
DSI1_DN3: J1.108 J21.8
DSI1_DP0: J1.94 J21.12
DSI1_DP1: J1.118 J21.18
DSI1_DP2: J1.112 J21.21
DSI1_DP3: J1.106 J21.9
EMMC_DISABLE_N: J1.2 R30.2
GPIO0-27_VREF: C13.1 J1.39 J1.40 R7.1 R32.1
GPIO7: J1.23 J20.1
GPIO8: J1.27 J20.2
GPIO9: J1.29 J20.3 R3136.1
GPIO10: J1.33 J20.4 R3135.1
GPIO28: J1.28 R27.1
GPIO28-45_VREF: C14.1 J1.41 J1.42 R8.1 R33.1
GPIO29: J1.30 R26.1
GPIO44: J1.82 R29.1
GPIO45: J1.84 R28.1
GYRO_INT: J1.89 U57.12
HDMI_CEC: J1.171 Q3.2(S) R15.1
HDMI_CK_N: J1.111 J13.14
HDMI_CK_P: J1.113 J13.12
HDMI_D0_N: J1.117 J13.11
HDMI_D0_P: J1.119 J13.9
HDMI_D1_N: J1.123 J13.8
HDMI_D1_P: J1.125 J13.6
HDMI_D2_N: J1.129 J13.5
HDMI_D2_P: J1.131 J13.3
HDMI_HPD: J13.1 Q4.1 R3062.2 U4.C3
HDMI_HPD_N_1V8: J1.88 Q4.3 R18.1
HDMI_SCL: J1.175 J13.17 U4.A3
HDMI_SDA: J1.173 J13.18 U4.B3(SDA)
IN2SYS_EN: R3092.2(B) R3093.1 U18.13 U597.7
LCD_RST: J1.21 J21.5 R3057.2(B)
MCU_3V3: C2477.1 C2478.1 C2481.1 FB7.1 J7.1 R272.2 R3040.2 R3043.1 R3049.1 R3054.2 R3060.1 TP65.1(PIN1) U18.16 U60.5(OUT)
MCU_IND: Q5.1 R3059.2 U18.9
MCU_REV1: J1.75 U18.6
MCU_REV2: J1.77 U18.7
MCU_RST: R272.1 U18.4
OSC_IN: C2475.1 U18.2 Y2.3
OSC_OUT: C2476.1 U18.3 Y2.1
PCM_CLK: J1.63 U598.26
PCM_DIN: J1.71 R3127.1
PCM_DOUT: J1.69 R3128.1
PCM_FS: J1.65 U598.28
RTC_CLK_32K768: R3131.1 U598.24
RTS1: J1.59 R3125.2
RXD0: J1.46 R3042.1 R3135.2
RXD1: J1.51 R3123.2
SCL0: J1.5 R43.2(B)
SCL1: J1.11 J11.20 R16.2 U57.23
SD1_CLK: J1.52 U598.17
SD1_CMD: J1.54 U598.16
SD1_D0: J1.58 U598.18
SD1_D1: J1.60 U598.19
SD1_D2: J1.64 U598.14
SD1_D3: J1.66 U598.15
SDA0: J1.3 R42.2(B)
SDA1: J1.9 J11.21 R17.2 U57.24
SDX_CLK: J1.10 J16.5
SDX_CMD: J1.12 J16.3
SDX_D0: J1.16 J16.7
SDX_D1: J1.18 J16.8
SDX_D2: J1.22 J16.1
SDX_D3: J1.24 J16.2
SDX_DET: J1.35 J16.9 R3132.1
SDX_VREF: C23.1 J1.4 J1.6 R31.1
SWCLK: J7.3 R3044.1 TP63.1(PIN1) U18.20
SWDIO: J7.2 R3043.2 TP62.1(PIN1) U18.19
SWITCH: R3054.1 SW2.2 U18.10
TOUCH_INT_B: J1.78 R120.2(B)
TP_RST: J1.76 R121.2(B)
TVDAC: J1.166 TP54.1(PIN1)
TXD0: J1.48 R3041.1 R3136.2
TXD1: J1.53 R3122.2
USB5V_AD: R3064.1 R3065.1 U18.8
USB_DM: J1.167 R122.1 U5.6
USB_DP: J1.165 R123.1 U5.1
USB_OTGID: J1.168 R12.2 TP53.1(PIN1)
VLED+: C76.1 C78.1 D10.C J21.29 J21.30 J21.31 TP33.1(PIN1)
VLED-: J21.25 J21.26 J21.27 R89.1 R90.1 R91.1 R3063.1
WL_DS: J1.83 R3129.2(B) U598.12
WL_H_WAKE: J1.87 U598.13(WL_H_WAKE)
N1202496: C6.1 R2.2 U1.12
N1202592: L1.1 U1.8
N1202604: L2.1 U1.2
N1202780: F1.1 J2.A9 J2.B9 TP41.1(PIN1)
N1203322: D1.1 R3.2
N1313759: C21.2 R22.2 R25.1 U1.4
N1313939: C22.2 R23.2 R24.1 U1.10
N1460421: R110.2 R112.2 U2.4
N1478133: D11.C J17.2 R42.1 R114.1
N1478157: D12.C J17.1 R43.1 R115.1
N1478281: C81.1 D14.C J17.4 R117.2 R121.1 TP28.1(PIN1)
N1478289: C82.1 D13.C J17.5 R118.2 R120.1 TP29.1(PIN1)
N12332208: J9.2 R125.1 TP60.1(PIN1) U12.5
N12332215: J9.1 TP61.1(PIN1) U12.8(VO2)
N12333733: Q6.3 R124.2 U12.1
N12334307: C86.1 U12.2 U12.3
N12334479: R125.2 R126.1 U12.4
N12334672: C87.2 R126.2
N12335205: C87.1 R127.2(B) R128.2(B) TP58.1(PIN1)
N12373140: R368.2(B) U57.1
N12374321: C383.1 R370.2(B) U57.8(VLOGIC)
N12375648: C384.1 U57.10
N12375668: R371.2(B) U57.11
N12378079: C386.2 U57.20
N12396095: R3039.1 R3040.1 U18.1
N12403489: R3042.2 U18.18
N12403491: R3041.2 U18.17
N12412618: C2480.1 D17.1 D18.1 TP64.1(PIN1) U60.1 U60.3
N12412734: R3049.2 R3051.2 U60.4
N12455505: J13.15 Q3.3 U4.A2
N12499716: D19.2(CATHODE) Q5.3
N12515410: J1.177 TP56.1(PIN1)
N12666038: J14.2 R122.2(B) U5.4
N12666138: J14.3 R123.2(B) U5.3
N12720539: D10.A L5.2 U6.3
N12720829: C73.1 R87.2(B) R88.1 R3066.2(B) U6.2
N12720857: R89.2(B) U6.6
N12720893: C74.1 U6.5
N12756350: R3086.2(B) R3088.2(B) U597.11
N12756432: C2483.2 R3087.1
N12756436: R3087.2(B) U597.1
N12756732: L634.1 U597.2 U597.21
N12756744: L634.2 R3089.1 U597.18
N12756890: R3090.2(B) R3091.1 U597.9
N12757066: C2492.1 R3094.2 R3096.2 R3102.1 TP45.1(PIN1) U597.5
N12757098: D20.2(CATHODE) U597.23
N12757102: D20.1 R3095.1
N12757182: R3097.1 U597.10
N12757282: R3098.2(B) R3101.2(B) R3103.2(B) R3137.2(B) TP47.1(PIN1) U597.12
N12757290: J23.2 R3098.1
N12757302: R3099.2(B) U597.26
N12757306: D21.2(CATHODE) U597.22
N12757310: D21.1 R3100.1
N12757446: R3102.2(B) R3104.2(B) U597.16
N12757490: C2493.1 U597.8
N12757522: R3105.2(B) U597.6
N12757526: R3106.2(B) U597.13
N12757530: R3107.2(B) U597.14
N12757582: R3105.1 R3108.1
N12785535: R3122.1 U598.42
N12785567: R3123.1 U598.43
N12785599: R3124.1 R3125.1 U598.44
N12785811: C2499.1 PCB1.1 R3126.2
N12785823: C2498.1 L635.1 R3126.1
N12785967: R3127.2 U598.27
N12786047: R3128.2 U598.25
N12786978: C2502.1 C2503.2 FB9.1 Y10.4(VCC)
N12787014: R3130.1 Y10.1
N12787058: R3131.2 Y10.3
N12806607: J2.A5 R3133.1
N12806623: J2.B5 R3134.1
N12808360: J1.90 TP51.1(PIN1)
N12836963: J13.19 R3058.1
N123465088: R373.2(B) U57.9
N124996560: D19.1 R3060.2
N127857271: C2498.2 U598.2

Pads without a net: J1 93 95 99 101 105 107 124 126 128 130 132 136 138 142 144 148 150 154 156 158 160 162 172 174 176 178 180; J13 2; J21 6 24 28; U1 5 11; U4 B1; U57 2 3 4 5 6 7 14 15 16 17 19 21 22; U598 4 5 8 10 11 21 23 29 30 32 35 37 38 39 40 41

## Via types
v1: diameter 0.508, hole 0.254, TOP to BOTTOM, 1308 vias

## Routing (per net, layer and track width the routed paths; a pad name or vN(x,y) marks a point on that pad's centre or on a via; arc(x,y) is an arc through that point)
1V8: length 72
  TOP w0.305: C22.1 R23.1 v1(27.85,19.3)
  TOP w0.508: R32.2 34.2,76.62 ; 34.2,76.62 34.15,76.58 26.83,76.58 23.66,73.41 v1(23.66,72.52) ; 34.2,76.62 R33.2
  L03 w0.305: v1(27.85,19.3) 29.01,20.46 29.01,27.53 29.5,28.02 29.5,32.64 v1(27.47,34.67)
  L03 w0.508: v1(22.35,40.13) v1(23.78,40.13) 27.97,44.32 27.97,52.89 28.6,53.52 28.6,54.79 27.97,55.42 27.97,67.06 24.42,70.61 24.42,71.75 v1(23.66,72.52)
3V3: length 24.9
  TOP w0.305: R3066.1 43.59,17.05 U2.3 ; R118.1 73.82,57.53 v1(73.69,57.4) ; R114.2 v1(73.69,64.94) ; C21.1 R22.1 v1(17.81,33.53) ; R117.1 v1(73.69,62.28) ; R115.2 79.07,66.85 v1(78.9,66.67)
  TOP w0.381: v1(16.92,19.43) 16.54,19.05 TP48.1
  L04 w0.305: v1(17.81,33.53) 15.4,31.11 15.4,24.38 16.08,23.7 16.08,21.42 v1(18.07,19.43)
  vias: v1(16.92,18.41) v1(18.07,18.41) v1(19.21,19.43) v1(19.21,18.41) v1(30.64,26.29) v1(30.64,25.27) v1(31.66,26.29) v1(31.66,25.27) v1(38.77,19.94) v1(38.77,18.92) v1(38.77,17.91) v1(39.78,19.94) v1(39.78,18.92) v1(39.78,17.91) v1(80.93,56.26) v1(80.93,55.24) v1(81.95,56.26) v1(81.95,55.24)
5V: length 15.3
  TOP w0.305: v1(75.21,7.95) 75.16,8 R3091.2 ; R3093.2 v1(72.42,6.6)
  L03 w0.305: 66.45,2.41 70.01,2.41 70.52,1.91 71.61,1.91 72.42,2.72 v1(72.42,6.6) 73.82,8 75.16,8 v1(75.21,7.95)
  vias: v1(12.35,64.9) v1(12.35,63.88) v1(13.37,64.9) v1(13.37,63.88) v1(64.55,1.82) v1(64.55,1.02) v1(65.57,1.82) v1(65.57,1.02) v1(66.58,1.82) v1(66.58,1.02)
GND: length 569.3
  TOP w0.152: v1(24.87,50.16) 24.65,50.39 U57.18
  TOP w0.203: v1(3.56,84.84) 3.64,84.75 J13.10 ; v1(3.68,83.44) 3.79,83.55 J13.4 ; v1(11.3,85.72) U4.C2 U4.B2 ; J13.16 4.22,85.95 3.81,86.36 v1(3.56,86.36) ; J13.7 7.42,84.15 v1(7.49,84.07) ; U597.28 64.03,11.83 v1(63.91,11.94) 64.2,12.23 U597.27 ; J13.13 6.99,85.35 7.37,85.72 v1(7.49,85.72)
  TOP w0.248: Q4.2 13.38,86.96 ; Q4.2 12.95,87.61 ; Q4.2 12.52,86.96 ; Q4.2 12.95,86.3
  TOP w0.254: v1(50.96,36.83) 50.58,36.45 R12.1 ; R3039.2 29.53,68.45 C2475.2 v1(30.26,69.98) ; J11.16 v1(83.57,76.75) ; v1(83.57,75.18) 83.63,75.25 J11.19 ; 35.97,75.47 C14.2 34.96,75.47 ; 35.97,77.82 C13.2 34.96,77.82 ; 74.45,6.1 R3092.1 74.96,6.6 ; R3108.2 74.45,5.72 ; R3108.2 74.45,4.7 ; R3108.2 74.96,5.21 ; J11.10 83.52,79.75 v1(83.47,79.7) ; C2492.2 71.69,4.32 ; C2492.2 71.69,3.3 ; C2492.2 72.2,3.81 ; U1.9 21.78,27.72 v1(22,27.94) 22.23,28.16 U1.3 ; 82.37,61.39 82.51,61.25 J17.3 ; J11.13 83.62,78.25 v1(83.6,78.23) ; v1(83.47,84.2) 83.52,84.25 J11.1 ; R3090.1 74.45,9.91 ; R3090.1 74.45,8.89 ; R3090.1 74.96,9.4 ; v1(69.24,14.73) U597.15 68.11,15.12 68.51,15.52 v1(68.51,15.67) ; v1(89.03,42.2) 88.02,42.2 J21.G2 v1(87,42.2) ; v1(83.47,81.2) 83.52,81.25 J11.7 ; v1(83.47,82.7) 83.52,82.75 J11.4 ; v1(63.91,11.94) v1(63.15,11.94)
  TOP w0.298: 84.73,14.45 J23.3 ; J23.3 85.73,14.9 ; J23.3 83.72,14.9 ; 75.82,79.91 J7.4 ; J7.4 76.83,80.37 ; J7.4 74.82,80.37
  TOP w0.305: v1(21.21,49.02) 21.24,48.99 C386.1 ; R29.2 51.34,62.74 v1(51.47,62.87) ; v1(40.04,63.75) 39.43,63.15 J1.79 ; J21.4 85.41,40.6 84.67,40.6 v1(84.45,40.39) ; v1(40.04,64.77) 39.86,64.95 J1.73 ; J1.92 v1(48.06,59.25) ; J1.127 v1(39.91,48.75) ; J1.61 v1(40.04,68.55) ; v1(23.66,71.5) 23.91,71.25 C2474.2 ; C2502.2 v1(22.77,76.58) ; J1.26 v1(48.14,82.65) ; J1.14 v1(45.01,86.25) ; R3039.2 v1(31.63,67.09) ; J1.62 48.73,68.25 v1(49.31,68.83) ; J1.31 39.53,81.15 39.91,81.53 v1(39.91,81.66) ; D14.A v1(78.01,61.01) ; v1(40.17,27.94) 39.76,28.35 J1.195 ; v1(31.4,47.88) 31.09,47.57 C383.2 ; v1(89.15,34.9) 89.15,34.9 J21.23 ; J1.181 39.59,32.55 v1(39.89,32.84) ; J1.91 v1(40.03,59.55) ; R3062.1 v1(9.88,88.8) ; J1.146 v1(48.04,43.05) ; J21.13 89.08,37.9 v1(89.15,37.97) ; v1(21.37,68.83) R3059.1 20.88,67.59 20.66,67.81 Q5.2 ; J1.7 v1(36.78,88.35) ; J1.116 v1(48.06,52.05) ; J1.50 47.75,71.85 v1(48.17,72.26) ; v1(25.78,72.86) 25.69,72.96 25.69,74.3 26.2,74.8 ; R3088.1 72.17,11.27 v1(72.17,11.56) R3103.1 ; R3104.1 v1(72.93,17.94) ; J1.38 v1(48.24,79.05) ; C86.2 v1(52.99,102.74) ; v1(40.04,72.26) 39.93,72.15 J1.49 ; C2476.2 v1(26.42,70.74) ; J1.67 v1(40.04,66.75) ; J1.86 48,61.05 v1(48.17,61.21) ; v1(44.99,32.64) 45.38,32.25 J1.182 ; J1.8 v1(44.95,88.05) ; J1.169 v1(39.91,36.15) ; v1(50.45,104.27) 50.8,104.62 R3061.1 51.56,104.4 Q6.2 ; v1(22.26,101.98) 22.36,101.88 C2500.2 ; R3053.2 v1(21.37,60.96) ; J21.7 88.95,39.7 v1(89.15,39.5) ; J1.145 v1(40.17,43.35) ; J1.44 v1(48.16,73.65) ; v1(41.99,47.03) 41.78,47.24 40.04,47.24 39.74,46.95 J1.133 ; J1.1 v1(36.76,90.15) ; J1.140 v1(48.02,44.85) ; v1(19.08,55.24) R3051.1 ; J1.80 v1(48.02,62.85) ; J1.157 v1(40.17,39.75) ; v1(48.29,30.35) 48.2,30.45 J1.188 ; v1(89.15,36.1) 89.15,36.1 J21.19 ; v1(89.03,31.75) 88.98,31.8 J21.G1 ; v1(44.71,27.99) 44.77,28.05 J1.196 ; J1.37 v1(39.89,79.35) ; J1.109 v1(40.01,54.15) ; v1(72.44,7.9) 72.34,8 C2493.2 ; J1.56 v1(48.11,70.05) ; J1.163 v1(40.17,37.95) ; R3106.1 v1(72.42,14.35) ; C81.2 v1(73.69,60.75) ; J1.97 v1(40.04,57.75) ; C6.2 v1(25.05,21.97) ; R373.1 v1(31.4,48.95) ; R28.2 51.34,61.47 v1(51.47,61.34) ; J1.98 v1(48.06,57.45) ; J21.22 85.41,35.2 84.77,35.2 v1(84.23,34.67) ; J1.104 v1(48.06,55.65) ; Y10.2 v1(25.04,82.15) ; U18.15 v1(25.6,60.58) ; R3133.2 v1(9.43,68.58) ; J1.139 v1(40.17,45.15) ; v1(84.23,36.2) 84.23,36.61 84.63,37 J21.16 ; v1(59.22,11.56) 59.37,11.56 C2483.1 60.74,11.08 R3099.1 ; v1(49.31,80.26) 49.03,80.26 48.44,80.85 J1.32 ; J1.25 39.77,82.95 v1(39.91,82.8) ; J1.152 v1(48.01,41.25) ; J1.68 v1(48.14,66.45) ; J1.19 v1(36.82,84.75) ; C2479.2 v1(22.64,71.5) ; C385.2 v1(26.29,54.07) ; v1(84.45,39.12) 84.77,38.8 J21.10 ; R368.1 v1(26.32,45.34) ; J1.110 v1(48.06,53.85) ; J1.187 v1(39.91,30.75) ; J1.121 v1(39.91,50.55) ; J1.74 v1(48.04,64.65) ; C14.2 v1(35.47,76.33) ; v1(78.01,62.99) 78.06,63.04 D11.A ; C82.2 v1(73.69,59.05) ; R24.2 v1(25.05,19.3) ; R371.1 v1(31.4,51.49) ; J1.20 v1(48.16,84.45) ; D12.A v1(78.06,65.07) ; R3134.2 v1(9.43,67.31) ; R3065.2 v1(21.37,65.53) ; v1(40.04,61.21) 39.9,61.35 J1.85 ; J1.103 v1(40.01,55.95) ; C384.2 v1(31.4,50.22) ; J1.122 v1(48.06,50.25) ; J1.170 v1(48.06,35.85) ; R3107.1 v1(72.42,15.75) ; v1(41.18,70.99) 40.54,70.35 J1.55 ; C13.2 v1(35.47,76.96) ; J1.13 v1(36.8,86.55) ; J1.164 v1(48.06,37.65) ; R25.2 v1(17.81,32.13) ; J1.43 v1(40,73.95) ; J1.115 v1(40.01,52.35) ; J1.151 v1(40.17,41.55) ; J1.134 v1(48.04,46.65)
  TOP w0.381: C24.2 32.13,7.26 ; C24.2 32.13,5.94 ; C24.2 32.76,6.6 ; 49.66,5.95 C78.2 ; C78.2 51.44,5.95 ; C78.2 50.55,6.72 ; 50.61,60.96 R28.2 50.61,61.98 ; D13.A 79.78,58.97 ; D13.A 78.28,58.97 ; D13.A 79.03,58.42 ; R3044.2 74.04,80.23 ; R3044.2 73.02,80.23 ; R3044.2 73.53,79.73 ; 18.19,23.86 C11.2 17.3,23.1 ; 44.36,20.95 C5.2 ; C5.2 44.99,21.62 ; C5.2 44.99,20.29 ; R87.1 45.5,15.4 ; R87.1 44.48,15.4 ; R87.1 44.99,15.9 ; 24.42,56.9 C2478.2 ; C2478.2 23.76,57.53 ; C2478.2 25.08,57.53 ; 51.12,63.25 R29.2 50.61,62.23 ; 30.07,9.4 C68.2 ; C68.2 31.39,9.4 ; C68.2 30.73,8.76 ; 18.55,32.64 R25.2 18.55,31.62 ; 30.66,51.99 R371.1 30.66,50.98 ; 30.66,49.45 R373.1 30.66,48.44 ; 16.13,49.15 16.51,49.53 v1(16.51,49.78) ; 16.13,49.15 U5.2 ; 16.13,49.15 15.68,49.59 v1(15.68,49.75) ; C74.2 50.94,10.92 ; C74.2 51.71,10.03 ; C74.2 50.94,9.14 ; R90.2 52.61,14.22 ; R90.2 53.27,13.59 ; R90.2 51.95,13.59 ; R112.1 49.47,17.4 ; R112.1 49.47,16.38 ; R112.1 49.97,16.89 ; 51.85,104.62 R3061.1 51.34,104.11 ; C2481.2 23.43,57.53 ; C2481.2 22.11,57.53 ; C2481.2 22.77,56.9 ; 25.46,44.83 R368.1 25.46,45.85 ; 26.29,52.45 C385.2 25.78,52.96 ; 47.15,13.08 C73.2 46.51,13.74 ; 32.64,8.27 C69.2 ; C69.2 33.53,9.03 ; C69.2 31.75,9.03 ; R27.2 50.74,82.42 ; R27.2 50.23,81.91 ; R27.2 50.23,82.93 ; 74.71,59.72 C82.2 74.71,58.39 ; 22.13,48.48 C386.1 21.62,48.48 ; 18.19,25.57 C7.2 17.3,26.33 ; 25.56,20.04 R24.2 24.54,20.04 ; 25.31,25.57 C8.2 ; C8.2 24.42,26.33 ; C8.2 26.2,26.33 ; J20.6 v1(6.73,23.75) ; 50.23,80.52 R26.2 ; R26.2 50.23,81.53 ; R26.2 50.74,81.03 ; 79.03,65.62 D12.A 79.78,65.07 ; 31.17,48.08 C383.2 30.66,48.08 ; 54.14,103.4 C86.2 54.14,102.08 ; R91.2 50.96,14.22 ; R91.2 50.3,13.59 ; R91.2 51.62,13.59 ; 30.66,50.72 C384.2 30.66,49.71 ; 19.94,55.75 R3051.1 19.94,54.74 ; 46.62,97.15 C23.2 ; C23.2 47.28,97.79 ; C23.2 47.94,97.15 ; 74.71,60.09 C81.2 74.71,61.41
  TOP w0.405: 82.18,35.6 R3063.2 ; R3063.2 83.5,35.6 ; R3063.2 82.84,36.24 ; 78.77,57.15 C80.2 ; C80.2 79.41,56.49 ; C80.2 79.41,57.81
  TOP w0.42: 79.03,62.48 D11.A 79.78,63.04 ; 79.78,61.01 D14.A 79.03,61.56
  TOP w0.442: 30.42,86.08 U598.33 ; U598.33 30.95,87.04 ; U598.33 30.42,87.99
  TOP w0.508: v1(10.32,52.07) 10.32,53.32 J14.5 ; C2490.2 76.33,22.97 ; C2490.2 75.44,22.21 ; C2490.2 77.22,22.21 ; C2488.2 67.33,6.22 ; C2488.2 67.33,4.44 ; C2488.2 68.09,5.33 ; 59.74,5.33 C2485.2 ; C2485.2 60.5,4.44 ; C2485.2 60.5,6.22 ; 19.1,76.83 C2503.1 ; C2503.1 18.34,77.72 ; C2503.1 19.1,78.61 ; 77.6,22.21 C2491.2 ; C2491.2 79.38,22.21 ; C2491.2 78.49,22.97 ; 68.09,7.37 C2489.2 67.33,6.48 ; C2486.2 60.5,8.26 ; C2486.2 60.5,6.48 ; C2486.2 59.74,7.37
  TOP w0.635: 5.38,62.86 J2.4 ; J2.4 6.49,63.67 ; J2.4 4.28,63.67 ; J2.4 5.38,64.47 ; J13.20 2.89,81.65 ; J13.20 1.36,82.65 ; J13.20 1.36,80.65 ; 31.07,30.61 C10.2 ; C10.2 32.8,30.61 ; C10.2 31.93,29.55 ; C12.2 27.21,33.04 ; C12.2 26.32,32.27 ; C12.2 25.43,33.04 ; J13.21 6.25,87.85 ; J13.21 4.72,88.85 ; J13.21 3.19,87.85 ; 12.1,42.93 J14.4 ; J14.4 12.1,44.97 ; J14.4 13.12,43.95 ; J14.4 11.08,43.95 ; 11,55.52 J14.5 9.8,55.2 ; 1.58,71.5 J2.2 ; J2.2 1.58,73.11 ; J2.2 2.69,72.31 ; J2.3 2.69,63.67 ; J2.3 1.58,62.86 ; J2.3 1.58,64.47 ; C3.2 31.93,28.99 ; C3.2 31.07,27.94 ; C3.2 32.8,27.94 ; J17.7 86.74,58.71 ; J17.7 86.74,57.4 ; J17.7 87.99,58.05 ; J17.7 85.49,58.05 ; J17.8 87.99,63.95 ; J17.8 86.74,64.61 ; J17.8 86.74,63.3 ; J17.8 85.49,63.95 ; 11,39.38 J14.6 ; J14.6 12.52,40.9 ; J14.6 11,42.42 ; 4.28,72.31 J2.1 ; J2.1 6.49,72.31 ; J2.1 5.38,71.5 ; J2.1 5.38,73.11 ; 63,106.26 C20.2 ; C20.2 62.14,107.31 ; C20.2 63,108.37 ; C20.2 63.86,107.31 ; Y2.2 30.03,73.72 ; Y2.2 29.12,74.53 ; Y2.2 28.22,73.72 ; SW2.1 3.4,97.93 ; SW2.1 2.55,96.97 ; SW2.1 4.26,96.97 ; SW2.1 3.4,96.02 ; 1.36,86.85 J13.23 ; J13.23 2.89,87.85 ; J13.23 1.36,88.85 ; C1.2 32.8,23.62 ; C1.2 31.07,23.62 ; C1.2 31.93,22.57 ; 4.72,80.65 J13.22 ; J13.22 3.19,81.65 ; J13.22 6.25,81.65
  TOP w0.686: 24,81.2 Y10.2 24.81,81.2
  TOP w0.755: C2484.2 59.49,4.1 ; C2484.2 60.36,3.05 ; C2484.2 59.49,1.99 ; C2484.2 58.63,3.05 ; C2.2 12.01,61.11 ; C2.2 9.9,61.11 ; C2.2 10.96,61.97 ; C2.2 10.96,60.25 ; C2487.2 68.34,4.1 ; C2487.2 67.47,3.05 ; C2487.2 68.34,1.99 ; C2487.2 69.2,3.05
  TOP w1.016: 35.69,7.45 C85.1 ; C85.1 37.29,8.51 ; C85.1 35.69,9.56 ; C85.1 34.09,8.51 ; 47.53,5.55 C76.2 ; C76.2 47.53,7.66 ; C76.2 49.13,6.61 ; C76.2 45.93,6.61
  GND02 w0.635: J13.23 1.36,88.78 ; J13.23 1.36,86.92 ; J13.23 2.82,87.85 ; J2.1 5.38,73.04 ; J2.1 4.35,72.31 ; J2.1 5.38,71.58 ; J2.1 6.41,72.31 ; J14.5 11,55.45 ; J14.5 12.45,54 ; J14.5 11,52.55 ; J13.21 6.18,87.85 ; J13.21 3.27,87.85 ; J13.21 4.72,88.78 ; J13.21 4.72,86.92 ; 12.1,43.01 J14.4 ; J14.4 12.1,44.89 ; J14.4 11.16,43.95 ; J14.4 13.04,43.95 ; J14.6 11,42.35 ; J14.6 12.45,40.9 ; J14.6 11,39.45 ; 3.4,96.09 SW2.1 ; SW2.1 4.18,96.97 ; SW2.1 2.63,96.97 ; SW2.1 3.4,97.85 ; 3.27,81.65 J13.22 ; J13.22 4.72,82.58 ; J13.22 4.72,80.72 ; J13.22 6.18,81.65 ; J2.3 2.61,63.67 ; J2.3 1.58,64.4 ; J2.3 1.58,62.94 ; 4.35,63.67 J2.4 ; J2.4 5.38,64.4 ; J2.4 6.41,63.67 ; J2.4 5.38,62.94 ; 1.36,80.72 J13.20 ; J13.20 1.36,82.58 ; J13.20 2.82,81.65 ; 1.58,71.58 J2.2 ; J2.2 2.61,72.31 ; J2.2 1.58,73.04
  L03 w0.635: 4.72,82.78 J13.22 4.72,80.52 ; 1.36,88.98 J13.23 1.36,86.72 ; 4.15,72.31 J2.1 ; J2.1 5.38,71.38 ; J2.1 5.38,73.24 ; J2.1 6.61,72.31 ; 11,39.25 J14.6 9.58,39.48 ; J2.4 5.38,64.6 ; J2.4 6.61,63.67 ; J2.4 5.38,62.74 ; J2.4 4.15,63.67 ; 1.36,80.52 J13.20 1.36,82.78 ; J2.3 1.58,64.6 ; J2.3 2.81,63.67 ; J2.3 1.58,62.74 ; J13.21 4.72,88.98 ; J13.21 4.72,86.72 ; J13.21 6.38,87.85 ; J2.2 1.58,73.24 ; J2.2 2.81,72.31 ; J2.2 1.58,71.38 ; 3.4,95.89 SW2.1 ; SW2.1 4.38,96.97 ; SW2.1 2.42,96.97 ; SW2.1 3.4,98.05 ; 9.58,55.42 J14.5 11,55.65
  L04 w0.635: J13.22 4.72,82.72 ; J13.22 3.13,81.65 ; J13.22 4.72,80.58 ; 2.49,96.97 SW2.1 ; SW2.1 3.4,95.96 ; SW2.1 3.4,97.99 ; SW2.1 4.32,96.97 ; J14.5 11,55.59 ; J14.5 11,52.41 ; J14.5 12.59,54 ; 4.72,86.78 J13.21 3.93,86.78 ; J14.4 13.18,43.95 ; J14.4 11.02,43.95 ; J14.4 12.1,42.87 ; J14.4 12.1,45.03 ; 1.36,88.92 J13.23 1.36,86.78 ; J14.6 11,42.49 ; J14.6 11,39.31 ; J14.6 12.59,40.9 ; J13.20 1.36,82.72 ; J13.20 1.36,80.58 ; J13.20 2.96,81.65 ; J2.4 5.38,64.54 ; J2.4 4.21,63.67 ; J2.4 6.55,63.67 ; J2.4 5.38,62.8 ; 4.21,72.31 J2.1 ; J2.1 6.55,72.31 ; J2.1 5.38,73.18 ; J2.1 5.38,71.44 ; 1.58,62.8 J2.3 ; J2.3 2.75,63.67 ; J2.3 1.58,64.54 ; 1.58,71.44 J2.2 ; J2.2 1.58,73.18 ; J2.2 2.75,72.31
  BOTTOM w0.635: SW2.1 3.4,97.85 ; SW2.1 4.18,96.97 ; SW2.1 3.4,96.09 ; SW2.1 2.63,96.97 ; J13.20 1.36,82.58 ; J13.20 2.82,81.65 ; J13.20 1.36,80.72 ; J2.3 2.61,63.67 ; J2.3 1.58,64.4 ; J2.3 1.58,62.94 ; J13.22 6.18,81.65 ; J13.22 3.27,81.65 ; J13.22 4.72,82.58 ; J13.22 4.72,80.72 ; 4.72,86.92 J13.21 ; J13.21 6.18,87.85 ; J13.21 4.72,88.78 ; J13.21 3.27,87.85 ; J2.4 5.38,64.4 ; J2.4 4.35,63.67 ; J2.4 5.38,62.94 ; J2.4 6.41,63.67 ; J2.1 6.41,72.31 ; J2.1 5.38,71.58 ; J2.1 4.35,72.31 ; J2.1 5.38,73.04 ; J14.4 13.04,43.95 ; J14.4 12.1,43.01 ; J14.4 11.16,43.95 ; J14.4 12.1,44.89 ; 11,39.45 J14.6 ; J14.6 12.45,40.9 ; J14.6 11,42.35 ; J13.23 2.82,87.85 ; J13.23 1.36,88.78 ; J13.23 1.36,86.92 ; 1.58,71.58 J2.2 ; J2.2 1.58,73.04 ; J2.2 2.61,72.31 ; J14.5 11,55.45 ; J14.5 12.45,54 ; J14.5 11,52.55
  vias: v1(1.05,55.37) v1(1.27,103.38) v1(1.43,107.95) v1(1.43,105.41) v1(1.43,100.33) v1(1.43,98.17) v1(1.43,95.25) v1(1.43,92.71) v1(1.43,90.17) v1(1.43,86.36) v1(1.43,83.82) v1(1.43,80.01) v1(1.43,77.47) v1(1.43,74.93) v1(1.43,71.12) v1(1.43,68.58) v1(1.43,66.04) v1(1.43,62.23) v1(1.43,59.69) v1(1.43,57.15) v1(1.43,39.37) v1(1.43,36.83) v1(1.43,34.29) v1(1.43,31.75) v1(1.43,28.83) v1(1.43,26.67) v1(1.43,21.59) v1(1.43,19.05) v1(1.43,16.51) v1(1.43,13.97) v1(1.43,8.89) v1(1.65,23.24) v1(2.45,55.37) v1(2.79,70.1) v1(2.79,67.44) v1(3.05,65.41) v1(3.59,21.46) v1(3.59,18.92) v1(3.81,23.5) v1(3.94,103.38) v1(3.97,105.41) v1(3.97,100.33) v1(3.97,98.17) v1(3.97,95.25) v1(3.97,92.71) v1(3.97,90.17) v1(3.97,80.01) v1(3.97,77.47) v1(3.97,74.93) v1(3.97,71.12) v1(3.97,62.23) v1(3.97,59.69) v1(3.97,57.15) v1(3.97,36.83) v1(3.97,34.29) v1(3.97,31.75) v1(3.97,28.83) v1(3.97,26.67) v1(3.97,16.51) v1(3.97,13.97) v1(3.97,8.89) v1(4.06,25.02) v1(6,98.3) v1(6.51,107.95) v1(6.51,105.41) v1(6.51,102.87) v1(6.51,95.25) v1(6.51,92.71) v1(6.51,90.17) v1(6.51,80.01) v1(6.51,77.47) v1(6.51,74.93) v1(6.51,64.77) v1(6.51,62.23) v1(6.51,59.69) v1(6.51,57.15) v1(6.51,39.37) v1(6.51,36.83) v1(6.51,34.29) v1(6.51,31.75) v1(6.51,28.83) v1(6.51,26.67) v1(6.48,25.15) v1(6.51,16.51) v1(6.51,13.97) v1(6.51,11.43) v1(6.51,8.89) v1(6.64,55.24) v1(7.11,66.29) v1(7.49,82.68) v1(8.42,96.77) v1(8.38,63.5) v1(8.54,98.3) v1(8.92,107.95) v1(9.02,66.29) v1(9.05,105.41) v1(9.05,102.87) v1(9.05,95.25) v1(9.05,92.71) v1(9.05,90.17) v1(9.05,74.93) v1(9.05,72.39) v1(9.05,64.77) v1(9.05,62.23) v1(9.05,60.96) v1(9.05,59.69) v1(9.05,58.42) v1(9.05,57.15) v1(9.05,39.37) v1(9.05,36.83) v1(9.05,11.43) v1(9.05,8.89) v1(9.05,6.35) v1(9.05,3.81) v1(9.05,1.27) v1(10.32,96.77) v1(10.32,59.69) v1(10.32,58.42) v1(10.32,55.88) v1(10.32,49.53) v1(10.32,46.99) v1(10.32,44.45) v1(10.45,94.49) v1(10.57,92.71) v1(10.57,90.17) v1(10.92,57.28) v1(11.46,107.95) v1(11.59,105.41) v1(11.59,102.87) v1(11.59,8.89) v1(11.59,6.35) v1(11.59,3.81) v1(11.59,1.27) v1(12.06,17.14) v1(12.57,15.24) v1(13.08,87.88) v1(13.5,6.35) v1(13.5,3.81) v1(13.5,1.27) v1(13.59,45.59) v1(13.59,15.88) v1(14,107.95) v1(13.97,18.41) v1(14.13,105.41) v1(14.13,102.87) v1(14.13,13.97) v1(14.48,45.59) v1(15.4,57.28) v1(15.4,17.78) v1(15.4,15.24) v1(15.53,94.49) v1(15.53,92.46) v1(15.49,16.51) v1(16.29,93.47) v1(16.29,91.19) v1(16.43,88.37) v1(16.54,107.95) v1(16.67,105.41) v1(16.67,102.87) v1(16.67,12.95) v1(16.67,11.43) v1(16.67,1.27) v1(16.92,26.42) v1(16.92,25.15) v1(16.92,24.13) v1(16.92,22.86) v1(17.21,89.44) v1(17.18,83.06) v1(17.31,81.15) v1(17.56,92.46) v1(17.56,91.19) v1(17.56,75.82) v1(17.56,74.17) v1(17.94,1.27) v1(18.58,25.15) v1(18.58,24.13) v1(18.7,83.06) v1(18.7,81.15) v1(18.7,79.12) v1(18.82,76.66) v1(19.08,107.95) v1(19.21,105.41) v1(19.21,102.87) v1(19.21,12.95) v1(19.21,11.43) v1(19.21,1.27) v1(19.81,6.99) v1(20.7,7.87) v1(21.12,28.45) v1(21.12,27.43) v1(21.24,85.6) v1(21.62,107.95) v1(21.75,105.41) v1(21.75,102.87) v1(21.84,97.16) v1(21.75,12.95) v1(21.75,11.43) v1(22.1,88.65) v1(22.89,28.45) v1(22.89,27.43) v1(23.37,97.16) v1(23.5,90.3) v1(23.66,56.52) v1(23.91,27.43) v1(23.91,26.04) v1(24.16,107.95) v1(24.29,105.41) v1(24.29,102.87) v1(24.26,88.65) v1(24.29,11.43) v1(24.54,101.6) v1(24.8,56.52) v1(24.87,49.02) v1(24.87,48.01) v1(25.05,100.33) v1(25.18,24.77) v1(25.31,31.11) v1(25.53,90.3) v1(25.81,50.16) v1(25.81,49.02) v1(25.81,48.01) v1(26.07,57.53) v1(26.07,56.52) v1(26.07,4.7) v1(26.07,3.68) v1(26.45,31.11) v1(26.45,26.8) v1(26.45,25.91) v1(26.45,24.77) v1(26.7,107.95) v1(26.83,105.41) v1(26.83,102.87) v1(26.83,45.72) v1(26.83,44.45) v1(26.96,50.16) v1(26.96,49.02) v1(26.96,48.01) v1(27.08,101.6) v1(27.18,88.52) v1(27.3,97.03) v1(27.3,90.68) v1(27.59,100.33) v1(27.59,33.27) v1(27.59,32.13) v1(27.59,31.11) v1(27.85,102.87) v1(27.85,4.7) v1(27.85,3.68) v1(28.07,7.37) v1(28.35,107.31) v1(28.35,105.28) v1(28.35,103.89) v1(28.35,101.73) v1(28.37,100.66) v1(28.35,97.03) v1(28.62,85.6) v1(28.74,91.82) v1(28.74,89.92) v1(28.74,88.9) v1(28.74,32.13) v1(28.74,31.11) v1(28.74,29.84) v1(28.74,28.7) v1(28.7,8.13) v1(28.86,56.26) v1(28.96,74.8) v1(29.21,55.24) v1(29.34,7.49) v1(29.37,97.03) v1(29.72,84.84) v1(29.88,89.03) v1(29.88,4.7) v1(29.88,3.68) v1(30.13,91.82) v1(30.07,77.95) v1(30.1,56.26) v1(30.1,8.13) v1(30.23,54.23) v1(30.32,73.41) v1(30.26,28.32) v1(30.39,89.92) v1(30.42,85.6) v1(30.51,97.03) v1(30.64,106.68) v1(30.64,105.41) v1(30.64,104.14) v1(30.64,102.87) v1(30.64,101.73) v1(30.63,100.63) v1(30.64,83.82) v1(30.64,31.24) v1(30.64,29.97) v1(30.64,27.56) v1(30.64,24.13) v1(30.64,22.99) v1(31.24,8.13) v1(31.53,4.7) v1(31.53,3.68) v1(31.91,83.82) v1(31.91,82.55) v1(31.88,54.23) v1(31.91,41.91) v1(32.26,50.42) v1(33.02,4.95) v1(33.05,91.95) v1(33.05,90.16) v1(33.18,107.95) v1(33.18,105.41) v1(33.18,102.87) v1(33.18,100.58) v1(33.18,88.9) v1(33.18,86.36) v1(33.18,85.09) v1(33.18,43.18) v1(33.18,41.91) v1(33.4,8) v1(33.43,7.11) v1(33.66,54.23) v1(33.78,50.42) v1(34.32,5.97) v1(34.32,4.7) v1(34.32,3.68) v1(34.42,87.76) v1(34.42,86.36) v1(34.42,56.39) v1(34.54,90.42) v1(34.45,85.09) v1(34.58,89.15) v1(35.31,6.6) v1(35.41,52.93) v1(35.59,4.7) v1(35.59,3.68) v1(35.72,107.95) v1(35.72,105.41) v1(35.72,102.87) v1(35.72,100.58) v1(35.72,85.98) v1(35.72,83.82) v1(35.69,44.45) v1(35.69,43.18) v1(35.69,41.91) v1(35.69,40.64) v1(35.69,39.37) v1(35.81,87.63) v1(35.94,56.39) v1(36.58,5.97) v1(36.86,3.68) v1(37.72,100.84) v1(37.85,4.83) v1(38.26,107.95) v1(38.26,105.41) v1(38.26,102.87) v1(39.24,3.81) v1(40.01,77.22) v1(40.01,75.95) v1(40.51,25.15) v1(40.8,107.95) v1(40.8,105.41) v1(41.18,37.97) v1(41.44,18.03) v1(41.56,27.94) v1(41.69,97.79) v1(42.07,36.83) v1(42.07,35.56) v1(42.32,18.03) v1(42.83,45.21) v1(42.83,43.31) v1(42.83,41.53) v1(42.83,39.75) v1(43.09,27.94) v1(43.34,113.03) v1(43.34,110.49) v1(43.34,107.95) v1(43.31,99.26) v1(43.34,86.36) v1(43.34,83.82) v1(43.31,77.34) v1(43.31,75.69) v1(43.34,37.97) v1(43.34,36.83) v1(43.34,35.56) v1(43.85,48.9) v1(43.85,47.12) v1(43.94,84.33) v1(44.23,22.1) v1(44.61,45.21) v1(44.61,43.31) v1(44.61,41.53) v1(44.61,39.75) v1(44.61,37.97) v1(44.61,36.83) v1(44.61,35.56) v1(44.58,25.15) v1(44.78,100.86) v1(44.86,19.94) v1(44.86,19.05) v1(44.86,18.03) v1(44.86,16.64) v1(45.37,22.1) v1(45.88,113.03) v1(45.88,110.49) v1(46.13,8.26) v1(46.39,18.03) v1(46.52,15.88) v1(46.52,14.61) v1(46.58,102.59) v1(47.15,99.06) v1(47.15,8.26) v1(47.66,18.03) v1(47.79,15.88) v1(47.79,14.61) v1(47.79,13.34) v1(47.79,9.27) v1(48.01,48.51) v1(48.17,35.05) v1(48.17,32.26) v1(48.42,113.03) v1(48.42,110.49) v1(48.42,104.14) v1(48.42,100.33) v1(48.42,97.79) v1(48.42,96.52) v1(48.39,77.22) v1(48.42,8.26) v1(48.67,13.34) v1(48.9,62.87) v1(48.93,39.37) v1(49.02,59.18) v1(49.4,73.53) v1(49.44,32.26) v1(49.69,74.93) v1(49.69,14.22) v1(49.69,12.95) v1(49.69,8.26) v1(49.69,7.11) v1(50.55,75.82) v1(50.55,66.67) v1(50.45,37.85) v1(50.58,56.13) v1(50.71,54.23) v1(50.67,52.2) v1(50.71,35.31) v1(50.96,113.03) v1(50.96,110.49) v1(50.96,102.87) v1(50.96,100.33) v1(50.96,97.79) v1(50.96,95.25) v1(50.96,92.71) v1(50.96,49.53) v1(50.96,46.99) v1(50.96,44.45) v1(50.96,41.91) v1(50.96,39.37) v1(50.96,8.26) v1(50.96,7.11) v1(52.2,68.33) v1(52.2,53.98) v1(52.23,35.56) v1(52.23,9.53) v1(52.23,8.26) v1(52.23,7.11) v1(52.7,38.1) v1(52.76,55.75) v1(52.76,54.74) v1(52.99,51.69) v1(52.99,50.67) v1(53.5,113.03) v1(53.5,110.49) v1(53.5,67.31) v1(53.5,49.53) v1(53.5,46.99) v1(53.5,44.45) v1(53.5,41.91) v1(53.5,39.37) v1(53.5,36.83) v1(53.5,14.61) v1(53.5,13.34) v1(53.5,9.53) v1(53.5,8.26) v1(53.5,7.11) v1(53.75,97.79) v1(53.75,95.25) v1(53.85,69.98) v1(54.77,14.61) v1(54.77,13.34) v1(55.5,38.1) v1(56.04,113.03) v1(56.04,110.49) v1(56.04,97.79) v1(56.04,95.25) v1(56.04,83.82) v1(56.04,80.01) v1(56.04,77.47) v1(56.04,74.93) v1(56.04,72.39) v1(56.04,69.85) v1(56.04,67.31) v1(56.04,49.53) v1(56.04,46.99) v1(56.04,44.45) v1(56.04,41.91) v1(56.04,39.37) v1(56.04,14.61) v1(56.04,13.34) v1(57.31,56.13) v1(57.31,54.61) v1(57.82,13.21) v1(57.82,12.06) v1(57.82,10.67) v1(57.82,9.14) v1(57.82,7.49) v1(57.82,5.84) v1(57.82,4.83) v1(57.82,1.82) v1(57.82,1.02) v1(58.58,113.03) v1(58.58,110.49) v1(58.58,97.79) v1(58.58,95.25) v1(58.58,92.71) v1(58.58,83.82) v1(58.58,80.01) v1(58.58,77.47) v1(58.58,74.93) v1(58.58,72.39) v1(58.58,69.85) v1(58.58,67.31) v1(58.58,49.53) v1(58.58,46.99) v1(58.58,44.45) v1(58.58,41.91) v1(58.83,1.82) v1(58.83,1.02) v1(59.22,7.49) v1(59.22,5.84) v1(59.22,4.83) v1(59.34,9.14) v1(59.85,27.69) v1(59.85,25.4) v1(59.85,1.82) v1(59.85,1.02) v1(60.36,9.14) v1(61.12,113.03) v1(61.12,110.49) v1(61.12,97.79) v1(61.12,95.25) v1(61.12,88.9) v1(61.12,83.82) v1(61.12,80.01) v1(61.12,77.47) v1(61.12,74.93) v1(61.12,72.39) v1(61.12,69.85) v1(61.12,46.99) v1(61.12,44.45) v1(61.88,29.97) v1(61.88,27.81) v1(63.15,11.23) v1(63.66,113.03) v1(63.66,110.49) v1(63.66,97.79) v1(63.66,95.25) v1(63.66,91.44) v1(63.66,88.9) v1(63.66,83.82) v1(63.66,80.01) v1(63.66,77.47) v1(63.66,74.93) v1(63.66,72.39) v1(63.66,45.72) v1(63.66,25.4) v1(63.91,11.23) v1(64.17,30.1) v1(64.3,107.95) v1(64.3,106.68) v1(65.06,28.07) v1(65.18,104.27) v1(65.18,103.25) v1(66.2,113.03) v1(66.2,110.49) v1(66.2,107.95) v1(66.2,106.68) v1(66.2,104.14) v1(66.2,102.87) v1(66.2,100.33) v1(66.2,97.79) v1(66.2,95.25) v1(66.2,91.44) v1(66.2,88.9) v1(66.2,83.82) v1(66.2,80.01) v1(66.2,77.47) v1(66.2,74.93) v1(66.2,57.15) v1(66.2,25.4) v1(67.34,6.35) v1(67.34,4.32) v1(67.47,104.14) v1(67.47,102.87) v1(67.47,57.15) v1(67.69,13.72) v1(67.69,12.83) v1(67.69,11.94) v1(67.72,1.82) v1(67.72,1.02) v1(68.36,7.24) v1(68.36,6.35) v1(68.36,5.33) v1(68.36,4.32) v1(68.74,113.03) v1(68.74,110.49) v1(68.74,107.95) v1(68.74,106.68) v1(68.74,100.33) v1(68.74,97.79) v1(68.74,95.25) v1(68.74,77.47) v1(68.74,74.93) v1(68.74,55.88) v1(68.74,54.61) v1(68.74,1.82) v1(68.74,1.02) v1(69.2,16.28) v1(69.53,15.52) v1(69.76,3.94) v1(69.76,3.05) v1(69.76,1.82) v1(69.76,1.02) v1(70.01,101.6) v1(71.28,113.03) v1(71.28,110.49) v1(71.28,107.95) v1(71.28,105.41) v1(71.28,102.87) v1(71.28,97.79) v1(71.28,95.25) v1(71.28,53.34) v1(71.28,1.27) v1(71.53,78.74) v1(71.53,76.2) v1(71.53,73.91) v1(71.69,3.05) v1(72.3,25.27) v1(72.55,99.06) v1(72.55,88.9) v1(72.55,86.36) v1(73.15,16.76) v1(73.82,113.03) v1(73.82,110.49) v1(73.82,107.95) v1(73.82,105.41) v1(73.82,102.87) v1(73.82,100.33) v1(73.82,95.25) v1(73.82,87.63) v1(73.82,78.74) v1(73.82,76.2) v1(73.82,73.91) v1(73.82,29.21) v1(73.82,26.67) v1(73.82,3.81) v1(73.82,1.27) v1(75.09,91.44) v1(75.09,87.63) v1(75.09,86.36) v1(75.06,10.11) v1(75.22,5.21) v1(75.98,97.16) v1(76.23,6.6) v1(76.36,113.03) v1(76.36,110.49) v1(76.36,107.95) v1(76.36,105.41) v1(76.36,102.87) v1(76.36,100.33) v1(76.36,93.98) v1(76.36,76.2) v1(76.36,73.91) v1(76.36,29.21) v1(76.36,3.81) v1(76.36,1.27) v1(78.01,58.97) v1(78.01,57.15) v1(77.98,16) v1(78.14,23.37) v1(78.39,13.72) v1(78.39,12.45) v1(78.39,11.18) v1(78.52,97.16) v1(78.74,88.9) v1(78.74,86.36) v1(78.9,113.03) v1(78.9,110.49) v1(78.9,107.95) v1(78.9,105.41) v1(78.9,102.87) v1(78.9,100.33) v1(78.9,93.98) v1(78.9,91.44) v1(78.9,8.89) v1(78.9,6.35) v1(78.9,3.81) v1(78.9,1.27) v1(79.41,23.37) v1(79.79,12.45) v1(79.79,11.18) v1(79.88,14.35) v1(80.17,24.13) v1(80.26,21.72) v1(80.81,84.2) v1(80.81,82.68) v1(80.81,78.61) v1(80.86,81.2) v1(80.86,79.7) v1(81.06,97.16) v1(81.19,12.45) v1(81.19,11.18) v1(81.28,14.22) v1(81.44,113.03) v1(81.44,110.49) v1(81.44,107.95) v1(81.44,105.41) v1(81.44,102.87) v1(81.44,100.33) v1(81.44,93.98) v1(81.44,91.44) v1(81.44,88.9) v1(81.41,86.36) v1(81.44,3.81) v1(81.44,1.27) v1(81.53,22.86) v1(81.69,36.2) v1(82.55,21.59) v1(82.71,26.67) v1(82.71,24.13) v1(82.68,14.48) v1(82.71,12.45) v1(82.71,11.18) v1(83.69,22.86) v1(83.98,105.41) v1(83.98,102.87) v1(83.98,100.33) v1(83.98,93.98) v1(83.98,91.44) v1(83.98,88.9) v1(83.98,86.36) v1(83.98,66.04) v1(83.98,63.5) v1(83.98,54.61) v1(83.98,52.07) v1(83.98,49.53) v1(83.98,46.99) v1(83.98,44.45) v1(84.07,14.1) v1(85.25,26.67) v1(85.25,24.13) v1(85.25,21.59) v1(85.25,12.7) v1(85.25,8.89) v1(85.98,14.1) v1(86.39,100.33) v1(86.36,56.52) v1(86.36,28.32) v1(86.36,10.79) v1(86.52,105.41) v1(86.52,102.87) v1(86.52,97.79) v1(86.52,95.25) v1(86.52,93.98) v1(86.52,91.44) v1(86.52,88.9) v1(86.52,83.82) v1(86.49,67.56) v1(86.52,66.04) v1(86.52,62.23) v1(86.52,59.69) v1(86.52,54.61) v1(86.52,52.07) v1(86.52,49.53) v1(86.52,46.99) v1(86.52,44.45) v1(86.49,18.29) v1(86.61,19.81) v1(86.61,16.38) v1(87,31.11) v1(87.79,29.21) v1(87.79,26.67) v1(87.79,24.13) v1(87.79,21.59) v1(87.79,15.24) v1(87.79,12.7) v1(87.79,8.89) v1(88.52,19.94) v1(88.52,16.51) v1(88.52,11.05) v1(88.77,30.99) v1(88.77,28.32) v1(88.93,100.33) v1(89.06,107.95) v1(89.06,105.41) v1(89.06,102.87) v1(89.06,97.79) v1(89.06,93.98) v1(89.06,91.44) v1(89.06,88.9) v1(89.06,86.36) v1(89.06,83.82) v1(89.06,81.28) v1(89.06,78.74) v1(89.06,76.2) v1(89.06,73.66) v1(89.06,71.12) v1(89.06,68.58) v1(89.06,66.04) v1(89.06,62.23) v1(89.06,59.69) v1(89.06,57.15) v1(89.06,54.61) v1(89.06,52.07) v1(89.06,49.53) v1(89.06,46.99) v1(89.06,44.45) v1(89.15,15.37)
